# Altium PCB Mako DSP R1.1.PcbDoc
Units mil, origin at the board's own origin, x right, y up, seen from the top; angles counter-clockwise.
Board outline 4500 x 2100 mil, 4 copper layers (Top Layer, GND, Power, Bottom Layer); 169 components, 129 nets, 625 pads, 140 vias.
Unrouted connection lines stored in the file: 132.
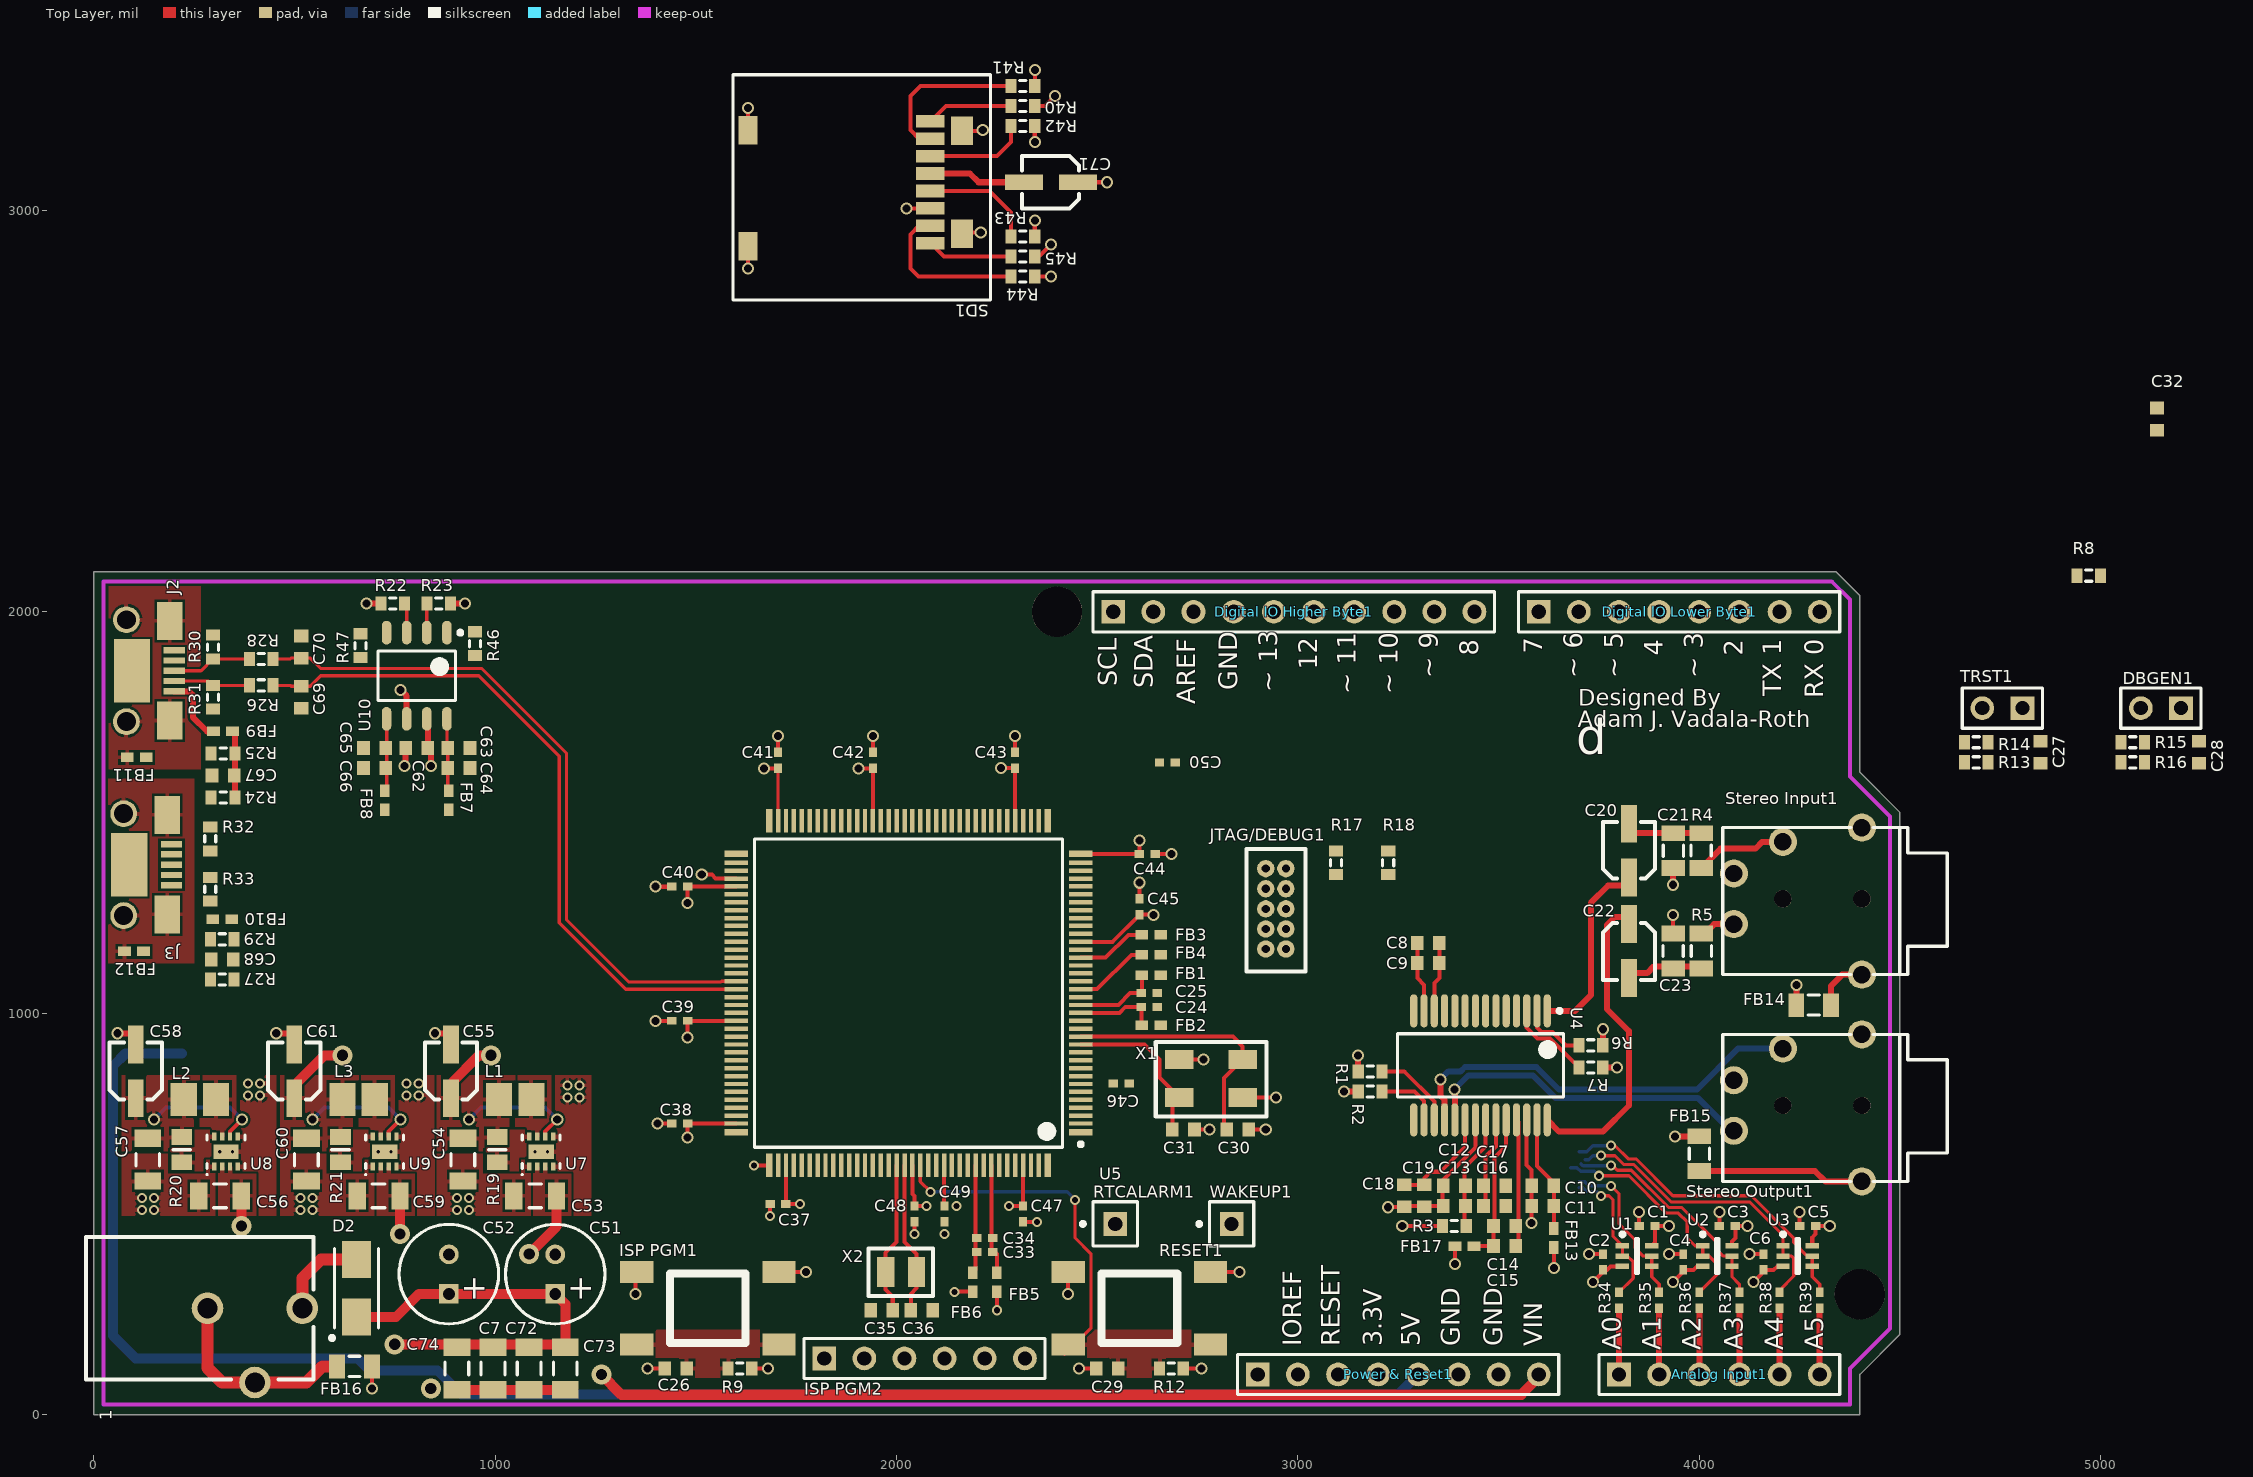
[diagram p0: Top Layer view]
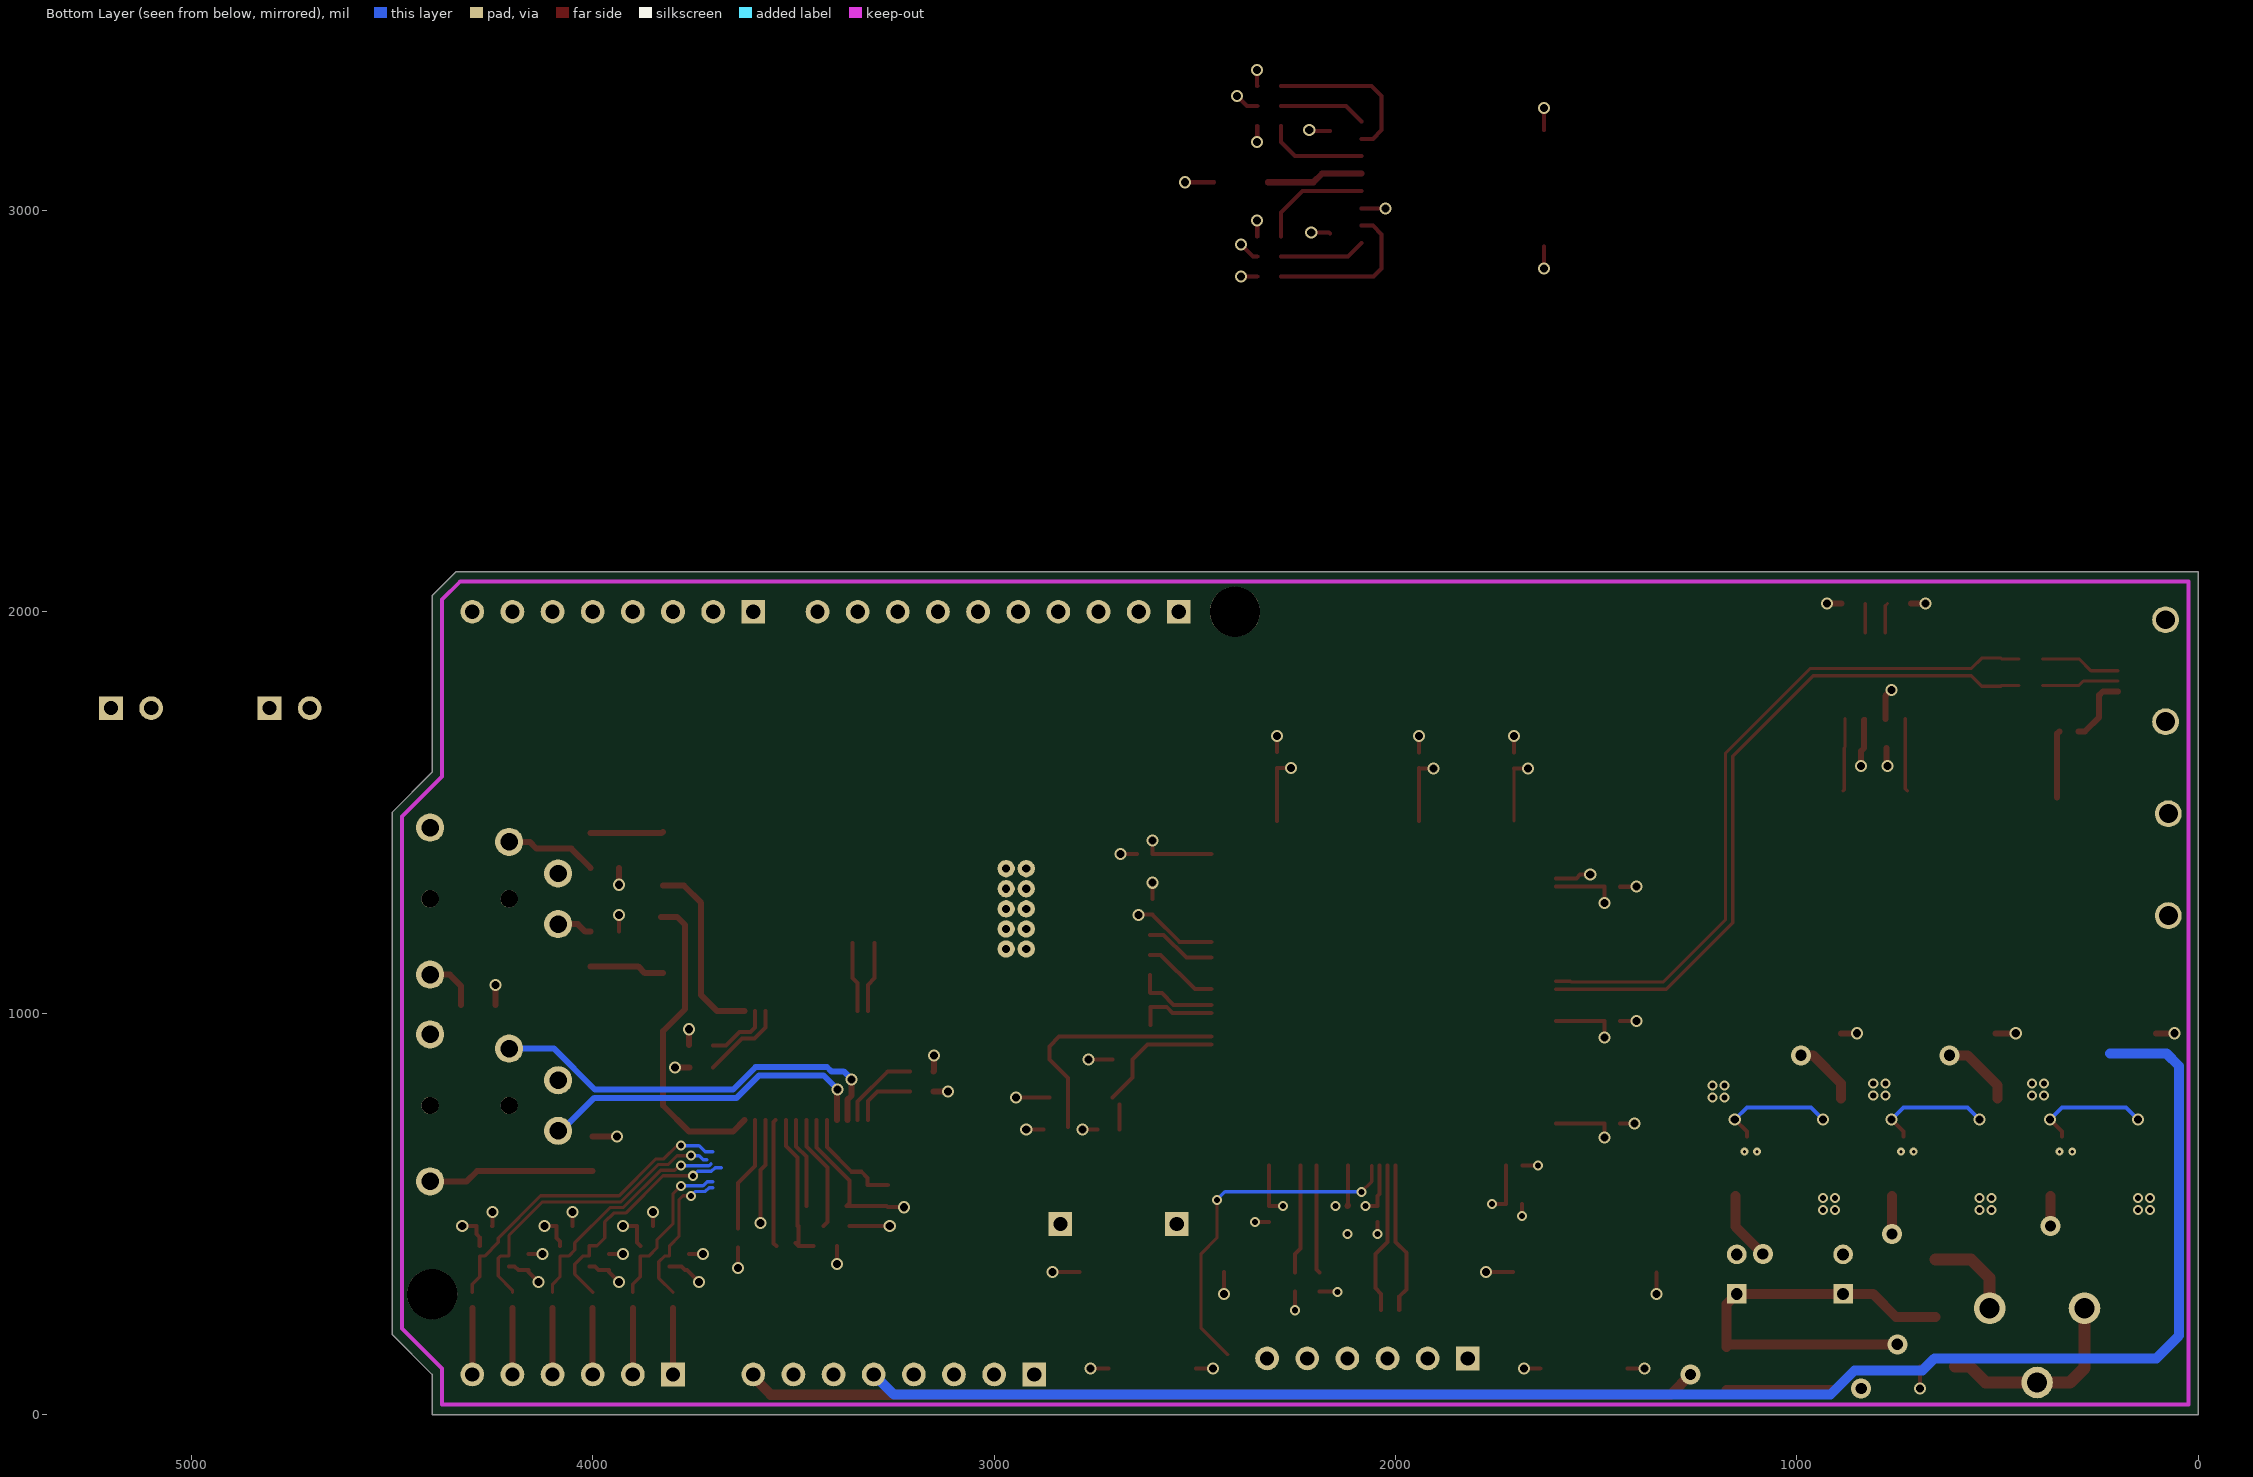
[diagram p1: Bottom Layer view, seen from below]
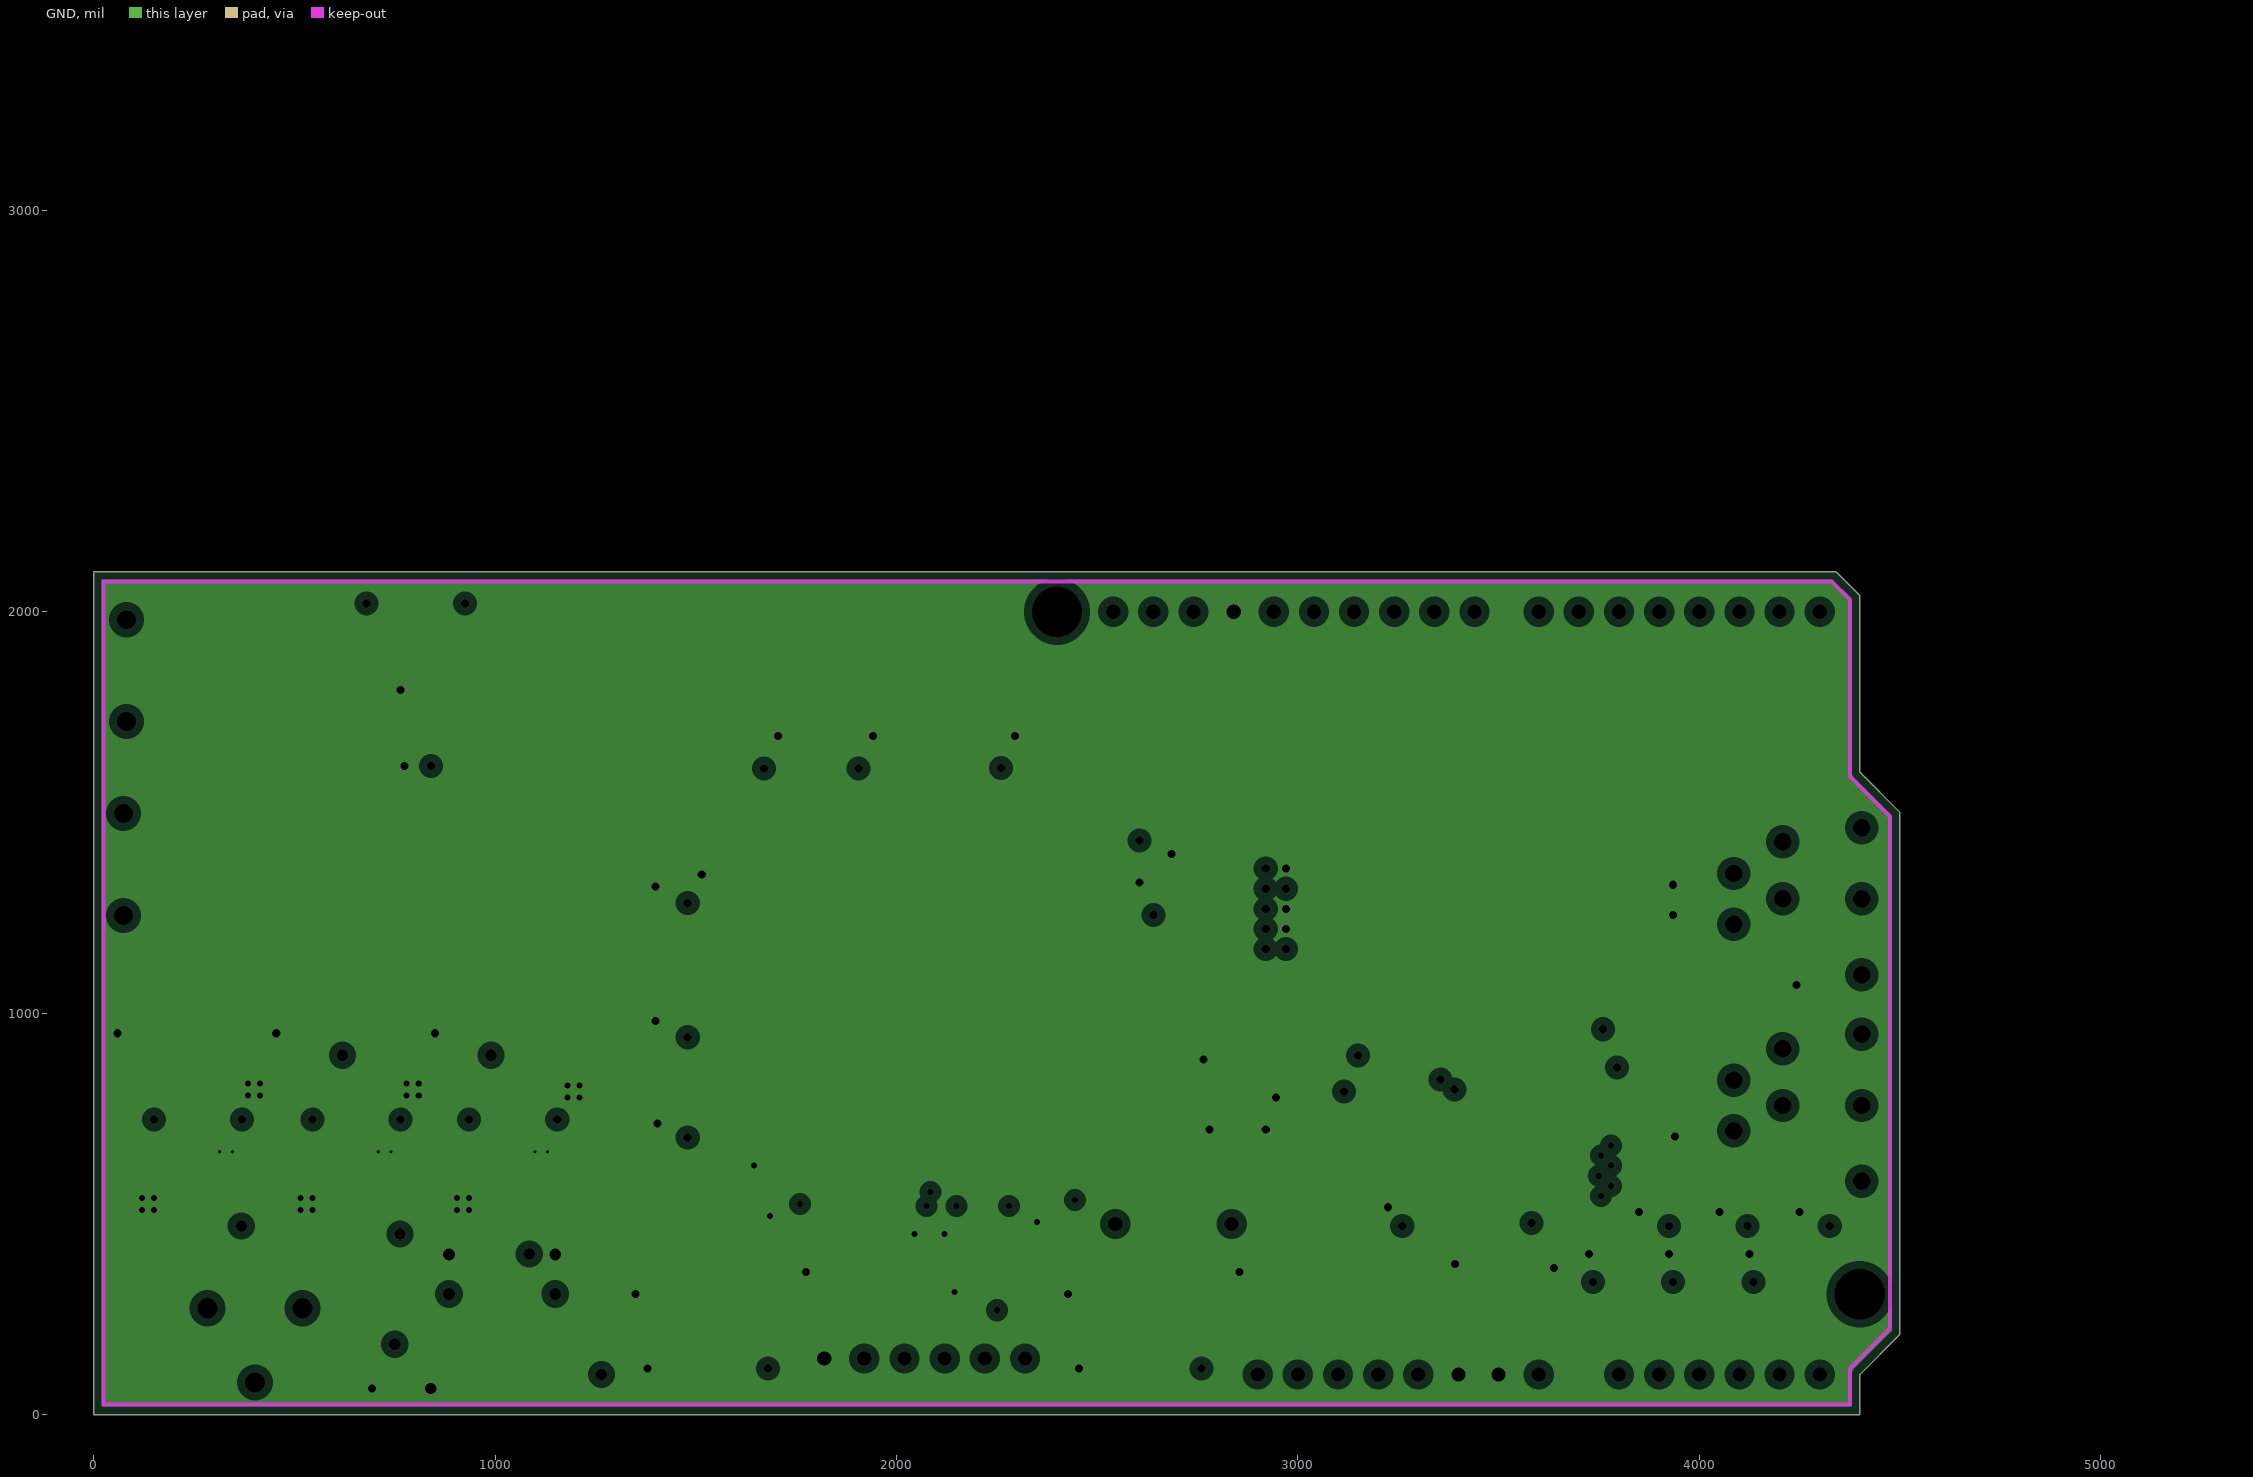
[diagram p2: GND, clearances drawn from the general rule]
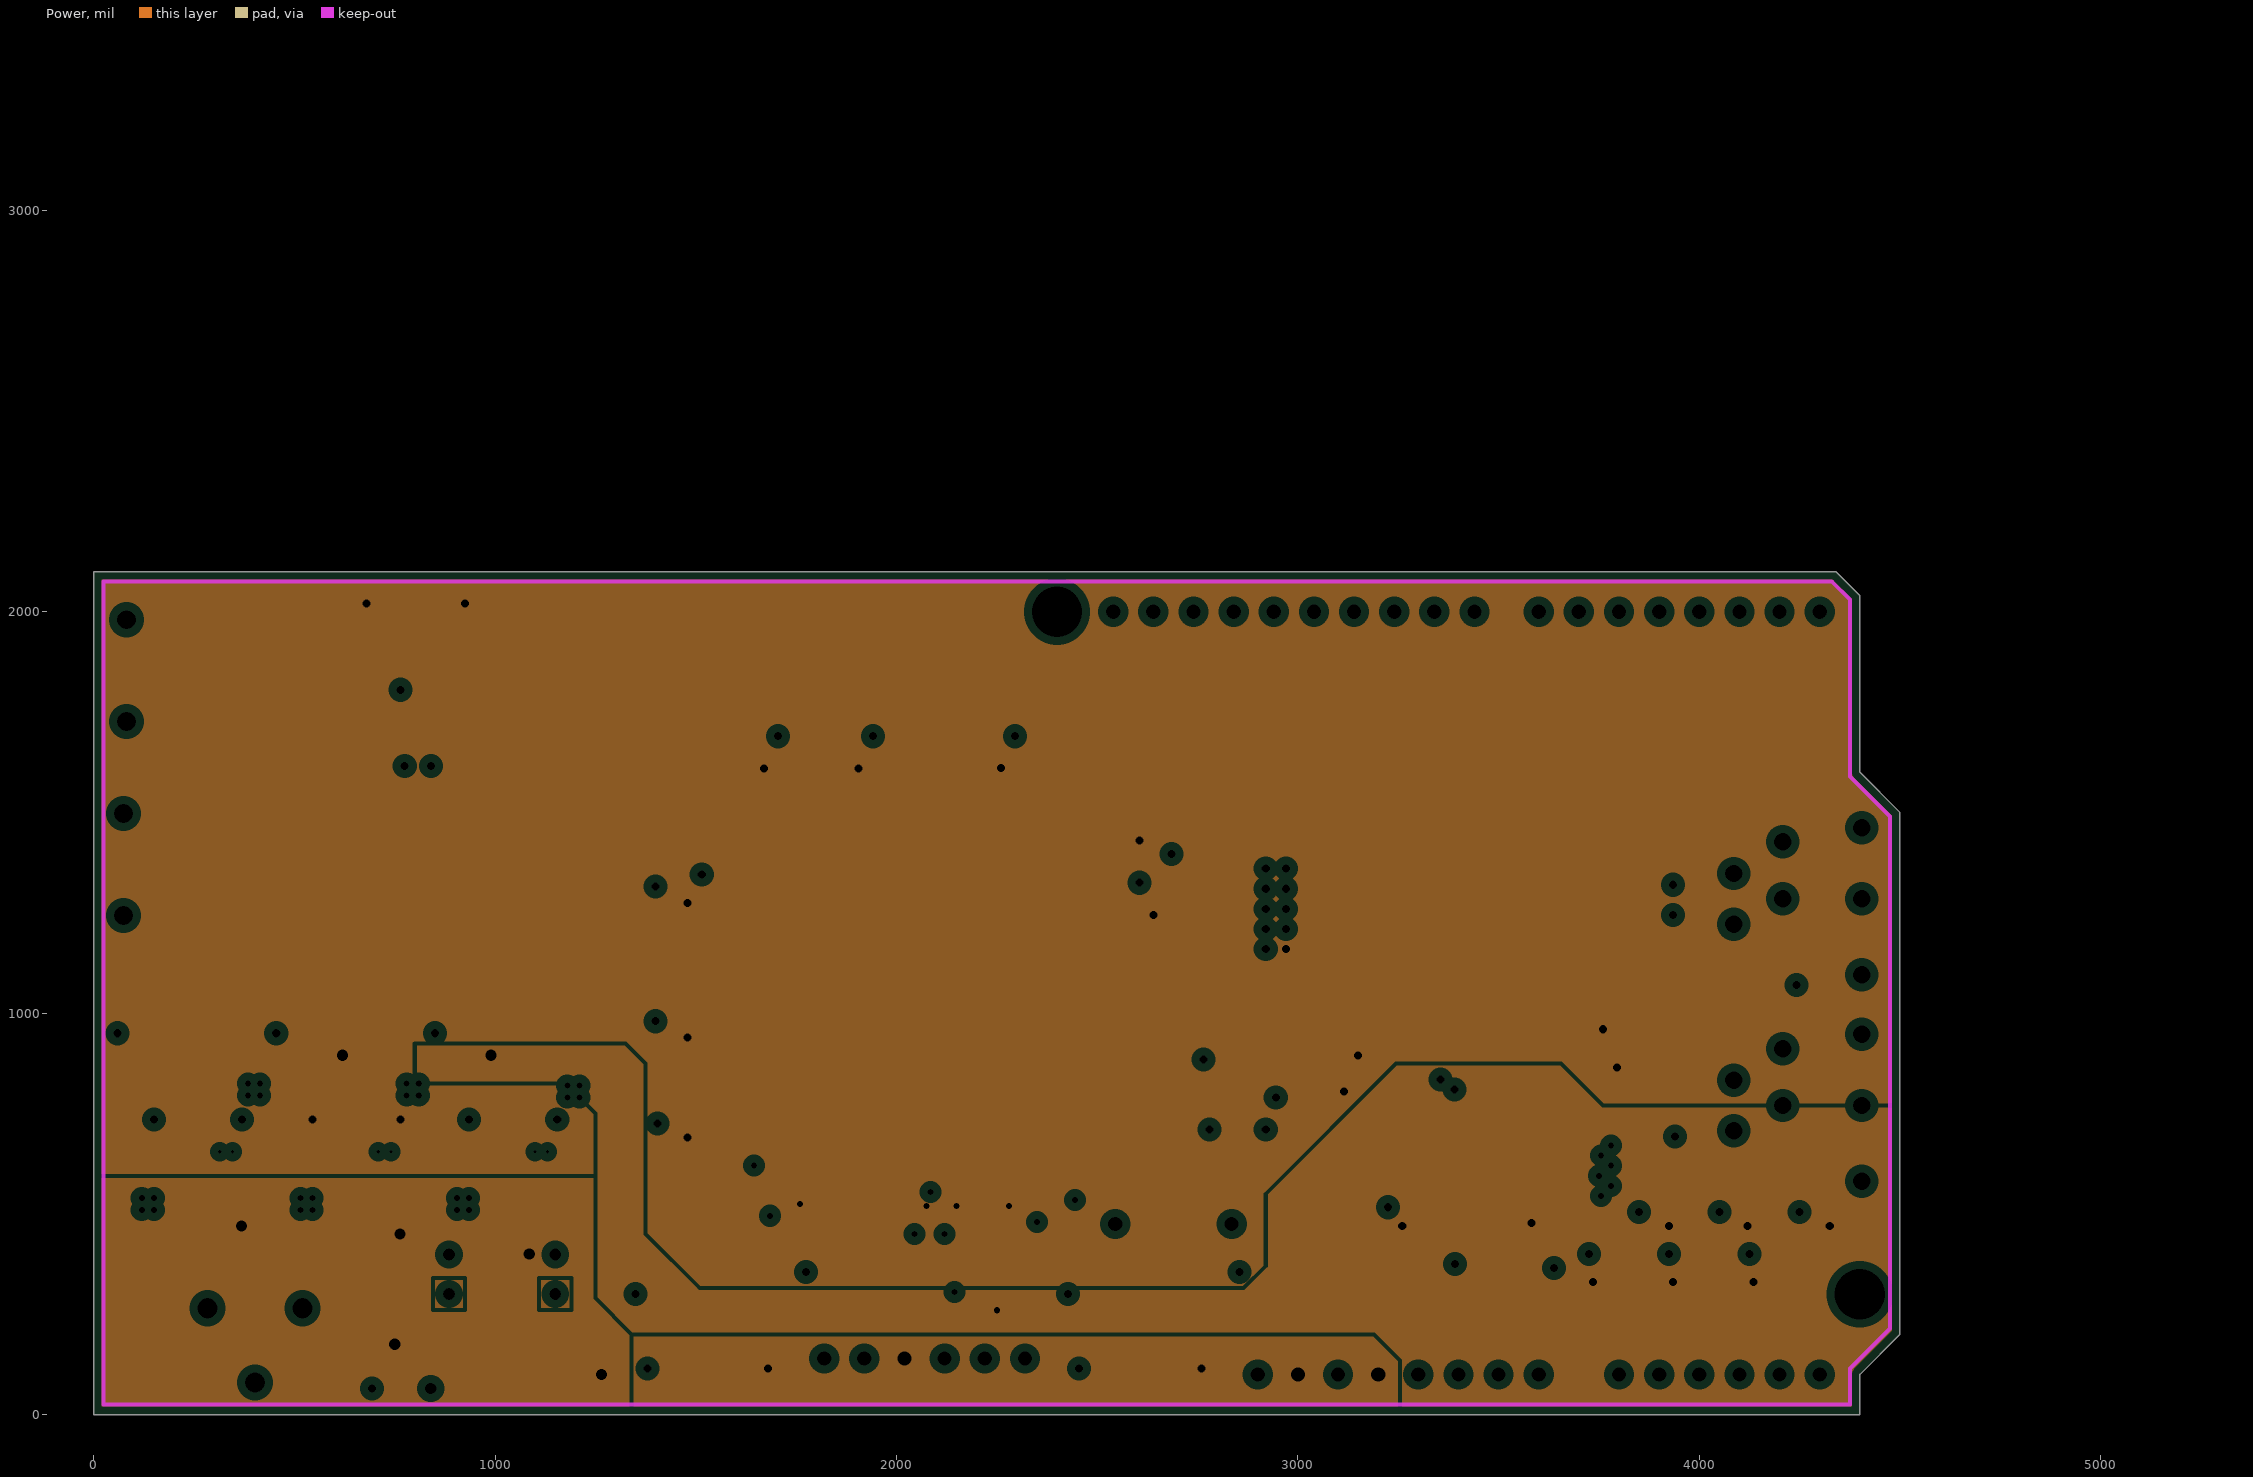
[diagram p3: Power, clearances drawn from the general rule]

## Layer stack, top to bottom
Top Layer: signal copper 1.4
Dielectric: core 12.6, FR-4, Dk 4.8
GND: plane copper 1.4, net GND
Dielectric: prepreg 12.6, FR-4, Dk 4.8
Power: plane copper 1.4, net (Multiple Nets)
Dielectric: core 12.6, FR-4, Dk 4.8
Bottom Layer: signal copper 1.4

## Board outline
0,0 0,2100 4340,2100 4400,2040 4400,1600 4500,1500 4500,200 4400,100 4400,0

## Design rules (kind name [scope] priority, off if disabled: settings)
Clearance [All] p1: gap=6
ComponentClearance [All] p1: gap=0 collisioncheckmode=3 verticalgap=10 showdistances=FALSE
DiffPairsRouting [All] p1: maxlimit=10 minlimit=10 mostfreqgap=10 maxuncoupledlength=500
FanoutControl Fanout_SOIC [(InComponent('U8') AND InComponent('U7'))] p3: bgadir=Out bgaviamode=Centered fanoutstyle=Staggered fanoutdirection=Alternating viagrid=1 // Fanout_SOIC (Default Rule)
FanoutControl Fanout_Small [All] p4: bgadir=Out bgaviamode=Centered fanoutstyle=Auto fanoutdirection=Alternating viagrid=1 // Fanout_Small (Default Rule)
HoleSize [All] p1: absolutevalues=TRUE maxlimit=120 minlimit=1 maxpercent=80.000 minpercent=20.000
MinimumSolderMaskSliver [All] p1 off: minsoldermaskwidth=10
PlaneClearance [All] p1: clearance=20
PlaneConnect [All] p1: planeconnectstyle=Direct reliefexpansion=20 reliefentries=4 reliefconductorwidth=10 reliefairgap=10
PolygonConnect [All] p1: connectstyle=Relief reliefconductorwidth=10 reliefentries=4 polygonreliefangle="90 Angle"
RoutingVias [All] p1: holewidth=15 width=25 viastyle="Through Hole" minholewidth=15 minwidth=25 maxholewidth=28 maxwidth=50
SilkToSilkClearance [All] p1 off: silktosilkclearance=10
SilkscreenOverComponentPads [All] p1 off: minsilkscreentomaskgap=10
SolderMaskExpansion [All] p1: expansion=4
Width [All] p1: maxlimit=30 minlimit=6 preferedwidth=6 minimp=50.000000 maximp=50.000000 favimp=50.000000
18 further rules are at their usual default settings.

## Classes and differential pairs
component class "Mako DSP Power R1.1": 1 12VDC/VCCIN C7 C51 C52 C53 C54 C55 C56 C57 C58 C59 C60 C61 C72 C73 C74 D2 D? FB16 L1 L2 L3 L? R19 R20 R21 U7 U8 U9
component class "Mako DSP Arduio IO R1.1": "Analog Input1" "Analog Input?" C1 C2 C3 C4 C5 C6 "Digital IO Higher Byte1" "Digital IO Higher Byte?" "Digital IO Lower Byte1" "Digital IO Lower Byte?" "Power & Reset1" "Power & Reset?" R34 R35 R36 R37 R38 R39 SSP? U1 U2 U3
component class "Mako DSP Audio Codec R1.1": C8 C9 C10 C11 C12 C13 C14 C15 C16 C17 C18 C19 C20 C21 C22 C23 FB13 FB14 FB15 FB17 R1 R2 R3 R4 R5 R6 R7 "Stereo Input1" "Stereo Input?" "Stereo Output1" "Stereo Output?" U4
component class "Mako DSP Main R1.1": C24 C25 C26 C27 C28 C29 C30 C31 C32 C33 C34 C35 C36 C37 C38 C39 C40 C41 C42 C43 C44 C45 C46 C47 C48 C49 C50 C71 DBGEN1 FB1 FB2 FB3 FB4 FB5 FB6 "ISP PGM" "ISP PGM1" "ISP PGM2" JTAG/DEBUG1 R8 R9 R12 R13 R14 R15 R16 R17 R18 R40 R41 R42 R43 R44 R45 RESET RESET1 RTCALARM1 SD1 TRST1 U5 WAKEUP1 X1 X2
component class "Mako DSP USBR1.1": C62 C63 C64 C65 C66 C67 C68 C69 C70 FB7 FB8 FB9 FB10 FB11 FB12 J2 J3 R22 R23 R24 R25 R26 R27 R28 R29 R30 R31 R32 R33 R46 R47 U10
differential pair USB_1: +USB_1_P -USB_1_N
differential pair USB1: +USB1_P -USB1_N
differential pair USB0: +USB0_P -USB0_N

## Components (designator, comment, footprint, x,y, rotation, side; value= is the part's Value field where it differs from the comment)
1 "Center-positive 2.1 mm power jack" PJ-102AH 520,265 r90 top
"Analog Input1" "Arduino Leonardo Analog" "Arduino Leonardo Analog" 3800,100 r0 top locked
C1 "Cap Semi" 0402 3870,470 r0 top
C2 "Cap Semi" 0402 3760,380 r270 top
C3 "Cap Semi" 0402 4070,470 r0 top
C4 "Cap Semi" 0402 3960,380 r270 top
C5 "Cap Semi" 0402 4270,470 r0 top
C6 "Cap Semi" 0402 4160,380 r270 top
C7 "Cap Semi" C1206 995,115 r90 top
C8 "Cap Semi" 1608[0603] 3325,1175 r180 top
C9 "Cap Semi" 1608[0603] 3325,1125 r180 top
C10 "Cap Semi" 1608[0603] 3610,570 r180 top
C11 "Cap Semi" 1608[0603] 3610,520 r180 top
C12 "Cap Semi" 1608[0603] 3390,570 r0 top
C13 "Cap Semi" 1608[0603] 3390,520 r0 top
C14 "Cap Semi" 1608[0603] 3515,470 r0 top
C15 "Cap Semi" 1608[0603] 3515,420 r0 top
C16 "Cap Semi" 1608[0603] 3490,520 r180 top
C17 "Cap Semi" 1608[0603] 3490,570 r180 top
C18 "Cap Semi" 1608[0603] 3265,545 r90 top
C19 "Cap Semi" 1608[0603] 3315,545 r90 top
C20 "Cap Semi" "Panasonic VS B" 3825,1405 r270 top
C21 "Cap Semi" "SM 0805 - gap trimmed" 3935,1405 r90 top
C22 "Cap Semi" "Panasonic VS B" 3825,1155 r90 top
C23 "Cap Semi" "SM 0805 - gap trimmed" 3935,1155 r270 top
C24 "Cap Semi" 0402 2630,1015 r180 top
C25 "Cap Semi" 0402 2630,1050 r180 top
C26 "Cap Semi" CAPC1608L 1450,115 r0 top
C27 "Cap Semi" CAPC1608L 4850,1650 r90 top
C28 "Cap Semi" CAPC1608L 5245,1650 r90 top
C29 "Cap Semi" CAPC1608L 2525,115 r0 top
C30 "Cap Semi" 1608[0603] 2850,710 r0 top
C31 "Cap Semi" 1608[0603] 2715,710 r180 top
C32 "Cap Semi" CAPC1608L 5140,2480 r90 top
C33 "Cap Semi" 0402 2220,405 r0 top
C34 "Cap Semi" 0402 2220,440 r0 top
C35 "Cap Semi" 1608[0603] 1963.23,260 r0 top
C36 "Cap Semi" 1608[0603] 2063.23,260 r180 top
C37 "Cap Semi" 0402 1705,525 r0 top
C38 "Cap Semi" 0402 1460,725 r0 top
C39 "Cap Semi" 0402 1460,981.1 r0 top
C40 "Cap Semi" 0402 1460,1315.75 r0 top
C41 "Cap Semi" 0402 1705.2,1630 r270 top
C42 "Cap Semi" 0402 1941.42,1630 r270 top
C43 "Cap Semi" 0402 2295.75,1630 r270 top
C44 "Cap Semi" 0402 2625,1396.85 r180 top
C45 "Cap Semi" 0402 2605,1265 r270 top
C46 "Cap Semi" 0402 2560,825 r180 top
C47 "Cap Semi" 0402 2315,500 r90 top
C48 "Cap Semi" 0402 2045,500 r90 top
C49 "Cap Semi" 0402 2120,500 r90 top
C50 "Cap Semi" 0402 2675,1625 r0 top
C51 "Cap Pol1" CAPPR2.5-6.3x5 1150,350 r90 top
C52 "Cap Pol1" CAPPR2.5-6.3x5 885,350 r90 top
C53 "Cap Semi" C1206 1100,545 r0 top
C54 "Cap Semi" C1206 920,635 r90 top
C55 "Cap Semi" "Panasonic VS B" 890,855 r270 top
C56 "Cap Semi" C1206 315,545 r0 top
C57 "Cap Semi" C1206 135,635 r90 top
C58 "Cap Semi" "Panasonic VS B" 105,855 r270 top
C59 "Cap Semi" C1206 710,545 r0 top
C60 "Cap Semi" C1206 530,635 r90 top
C61 "Cap Semi" "Panasonic VS B" 500,855 r270 top
C62 "Cap Semi" 1608[0603] 805,1660.65 r0 top
C63 "Cap Semi" 1608[0603] 910,1660.65 r180 top
C64 "Cap Semi" 1608[0603] 910,1610.65 r180 top
C65 "Cap Semi" 1608[0603] 700,1660.65 r0 top
C66 "Cap Semi" 1608[0603] 700,1610.65 r0 top
C67 "Cap Semi" 1608[0603] 322.36,1592.15 r0 top
C68 "Cap Semi" 1608[0603] 320.57,1134.02 r0 top
C69 "Cap Semi" 1608[0603] 517.36,1787.15 r90 top
C70 "Cap Semi" 1608[0603] 517.36,1912.15 r270 top
C71 "Cap Semi" "Panasonic VS B" 2385,3070 r0 top
C72 "Cap Semi" C1206 1085,115 r90 top
C73 "Cap Semi" C1206 1175,115 r90 top
C74 "Cap Semi" C1206 905,115 r90 top
D2 "PMEG4050EP" PMEG4050EP 655,315 r90 top
DBGEN1 "Header 2" HDR1X2 5200,1760 r180 top
"Digital IO Higher Byte1" "Arduino Leonardo High Byte" "Arduino Leonardo High Byte" 2540,2000 r0 top locked
"Digital IO Lower Byte1" "Arduino Leonardo Low Byte" "Arduino Leonardo Low Byte" 3600,2000 r0 top locked
FB1 "BLM15HG601SN1D" BLM18PG121SN1D 2635,1095 r180 top
FB2 "BLM15HG601SN1D" BLM18PG121SN1D 2635,970 r180 top
FB3 "BLM15HG601SN1D" BLM18PG121SN1D 2635,1195 r0 top
FB4 "BLM15HG601SN1D" BLM18PG121SN1D 2635,1145 r0 top
FB5 "BLM15HG601SN1D" BLM18PG121SN1D 2250,330 r90 top
FB6 "BLM15HG601SN1D" BLM18PG121SN1D 2190,330 r90 top
FB7 "BLM15HG601SN1D" BLM18PG121SN1D 885,1530.65 r270 top
FB8 "BLM15HG601SN1D" BLM18PG121SN1D 725,1530.65 r270 top
FB9 "BLM15HG601SN1D" BLM18PG121SN1D 322.36,1702.15 r180 top
FB10 "BLM15HG601SN1D" BLM18PG121SN1D 320.57,1234.02 r180 top
FB11 "BLM15HG601SN1D" BLM18PG121SN1D 107.36,1637.15 r0 top
FB12 "BLM15HG601SN1D" BLM18PG121SN1D 100.57,1154.02 r0 top
FB13 "BLM15HG601SN1D" BLM18PG121SN1D 3637.56,440 r270 top
FB14 "Ferrite" "SM 0805 - gap trimmed" 4285,1020 r180 top
FB15 "Ferrite" "SM 0805 - gap trimmed" 4000,650 r90 top
FB16 "Ferrite" "SM 0805 - gap trimmed" 650,120 r180 top
FB17 "BLM15HG601SN1D" BLM18PG121SN1D 3415,420 r180 top
"ISP PGM1" "Tactile Switch" TL3301 1530,265 r90 top
"ISP PGM2" "Header 6" HDR1X6 1820,140 r0 top
J2 "DX4R005J91R5100" "Micro USB Circular Holes Only" 42.36,1852.15 r270 top
J3 "DX4R005J91R5100" "Micro USB Circular Holes Only" 35.57,1369.02 r270 top
JTAG/DEBUG1 "S9015E-05-ND" S9015E-05-ND 2970,1360 r270 top
L1 "Inductor" VLS252012T-2R2M1R3 1050,785 r180 top
L2 "Inductor" VLS252012T-2R2M1R3 265,785 r180 top
L3 "Inductor" VLS252012T-2R2M1R3 660,785 r180 top
"Power & Reset1" "Arduino Leonardo Power" "Arduino Leonardo Power" 2900,100 r0 top locked
R1 "Res3" J1-0603 3180,855 r180 top
R2 "Res3" J1-0603 3180,805 r180 top
R3 "Res3" J1-0603 3390,470 r180 top
R4 "Res3" "SM 0805 - gap trimmed" 4005,1405 r270 top
R5 "Res3" "SM 0805 - gap trimmed" 4005,1155 r90 top
R6 "Res3" J1-0603 3730,920 r180 top
R7 "Res3" J1-0603 3730,865 r180 top
R8 "Res3" J1-0603 4970,2090 r0 top
R9 "Res3" J1-0603 1610,115 r0 top
R12 "Res3" J1-0603 2685,115 r0 top
R13 "Res3" J1-0603 4690,1625 r0 top
R14 "Res3" J1-0603 4690,1675 r0 top
R15 "Res3" J1-0603 5080,1675 r0 top
R16 "Res3" J1-0603 5080,1625 r0 top
R17 "Res3" J1-0603 3095,1375 r90 top
R18 "Res3" J1-0603 3225,1375 r90 top
R19 "Res3" RESC2012L 1005,660 r90 top
R20 "Res3" RESC2012L 220,660 r90 top
R21 "Res3" RESC2012L 615,660 r90 top
R22 "Res3" J1-0603 745,2020.65 r0 top
R23 "Res3" J1-0603 860,2020.65 r180 top
R24 "Res3" J1-0603 322.36,1537.15 r180 top
R25 "Res3" J1-0603 322.36,1647.15 r180 top
R26 "Res3" J1-0603 417.36,1816.68 r180 top
R27 "Res3" J1-0603 320.57,1084.02 r180 top
R28 "Res3" J1-0603 417.36,1882.63 r180 top
R29 "Res3" J1-0603 320.57,1184.02 r180 top
R30 "Res3" J1-0603 297.36,1912.15 r90 top
R31 "Res3" J1-0603 297.36,1787.15 r270 top
R32 "Res3" J1-0603 290.57,1434.02 r90 top
R33 "Res3" J1-0603 290.57,1309.02 r270 top
R34 "Res3" "0402 - duplicate" 3800,285 r90 top
R35 "Res3" "0402 - duplicate" 3900,285 r90 top
R36 "Res3" "0402 - duplicate" 4000,285 r90 top
R37 "Res3" "0402 - duplicate" 4100,285 r90 top
R38 "Res3" "0402 - duplicate" 4200,285 r90 top
R39 "Res3" "0402 - duplicate" 4300,285 r90 top
R40 "Res3" J1-0603 2315,3260 r180 top
R41 "Res3" J1-0603 2315,3310 r180 top
R42 "Res3" J1-0603 2315,3210 r180 top
R43 "Res3" J1-0603 2315,2935 r180 top
R44 "Res3" J1-0603 2315,2835 r180 top
R45 "Res3" J1-0603 2315,2885 r180 top
R46 "Res3" J1-0603 950,1920.65 r270 top
R47 "Res3" J1-0603 665,1915.65 r90 top
RESET1 "Tactile Switch" TL3301 2605,265 r90 top
RTCALARM1 "Socket" PIN1 2545,475 r90 top
SD1 "JAE SJ107021" "JAE SJ107021" 1630,3070 r180 top
"Stereo Input1" "CUI 43515TS" "CUI SJ-43515TS" 4405,1285 r180 top
"Stereo Output1" "CUI 43515TS" "CUI SJ-43515TS" 4405,770 r180 top
TRST1 "Header 2" HDR1X2 4805,1760 r180 top
U1 "BAV70S SOT-363" BAV70S_SOT363 3845,395 r0 top
U2 "BAV70S SOT-363" BAV70S_SOT363 4045,395 r0 top
U3 "BAV70S SOT-363" BAV70S_SOT363 4245,395 r0 top
U4 "WM8778" WM8778 3455,870 r270 top
U5 "LPC4330FBD144" SOT486-1_V 2030,1050 r180 top
U7 "TPS62162SOP" DSG8-1600X900TP 1115,655 r90 top
U8 "TPS62162SOP" DSG8-1600X900TP 330,655 r90 top
U9 "TPS62162SOP" DSG8-1600X900TP 725,655 r90 top
U10 "LM3526-H" LM3526 805,1840.65 r270 top
WAKEUP1 "Socket" PIN1 2835,475 r90 top
X1 "ABM3B-12.000MHZ-B2-T" ABM3B-12.000MHZ-B2-T 2705,790 r0 top
X2 "ABS07-32.768KHZ-T" ABS07-32.768KHZ-T 1973.23,355 r0 top

## Footprints (in the part's own frame and the unit in brackets; to place one, negate y for a bottom-side part, rotate by r counter-clockwise, add the part's x,y. Pads: shape width x height; smd on the part's side, far side on the other; paste and mask are expansions set on the pad)
0402 [mm] "Chip Capacitor, Body 1.0x0.5mm, IPC High Density"
  rect 0.6x0.5 smd: 1(-0.5,0) 2(0.5,0)
  body extent -0.55,-0.3 0.55,0.3, height 1.3
"0402 - duplicate" [mm] "Chip Capacitor, Body 1.0x0.5mm, IPC High Density"
  rect 0.6x0.5 smd: 1(-0.5,0) 2(0.5,0)
  body extent -0.55,-0.3 0.55,0.3, height 1.3
1608[0603] [mm] "Chip Capacitor, Body 1.6x0.8mm, IPC High Density"
  rect 0.8x0.9 smd: 1(-0.7,0) 2(0.7,0)
  body extent -0.87,-0.48 0.87,0.48, height 1.3
ABM3B-12.000MHZ-B2-T [mm] "ABM3B-12.000MHZ-B2-T 12MHZ Crystam Oscillator"
  rect 1.8x1.2 smd: 1(0,0) 2(4,0) 3(4,2.4) 4(0,2.4)
  silkscreen extent -1.5,-1.2 5.5,3.5
ABS07-32.768KHZ-T [mm] "ABS07-32.768KHZ-T Crystal Oscillator"
  rect 1.1x1.9 smd: 1(0,0) 2(1.95,0)
  silkscreen extent -1.1,-1.5 3,1.5
"Arduino Leonardo Analog" [mm] "Connector; Header; 6 Position"
  rect 1.5x1.5 hole 0.9: 1(0,0)
  round 1.5 hole 0.9: 2(2.54,0) 3(5.08,0) 4(7.62,0) 5(10.16,0) 6(12.7,0)
  silkscreen extent -1.27,-1.27 13.97,1.27
"Arduino Leonardo High Byte" [mm]
  rect 1.5x1.5 hole 0.9: 1(0,0)
  round 1.5 hole 0.9: 2(2.54,0) 3(5.08,0) 4(7.62,0) 5(10.16,0) 6(12.7,0) 7(15.24,0) 8(17.78,0) 9(20.32,0) 10(22.86,0)
  silkscreen extent -1.27,-1.27 24.13,1.27
"Arduino Leonardo Low Byte" [mm] "Connector; Header; 8 Position"
  rect 1.5x1.5 hole 0.9: 1(0,0)
  round 1.5 hole 0.9: 2(2.54,0) 3(5.08,0) 4(7.62,0) 5(10.16,0) 6(12.7,0) 7(15.24,0) 8(17.78,0)
  silkscreen extent -1.27,-1.27 19.05,1.27
"Arduino Leonardo Power" [mm] "Connector; Header; 8 Position"
  rect 1.5x1.5 hole 0.9: 1(0,0)
  round 1.5 hole 0.9: 2(2.54,0) 3(5.08,0) 4(7.62,0) 5(10.16,0) 6(12.7,0) 7(15.24,0) 8(17.78,0)
  silkscreen extent -1.27,-1.27 19.05,1.27
BAV70S_SOT363 [mm] "SOT23, 6-Leads, Body 2.2x2.2mm (max), Pitch 0.65mm, IPC Medium Density"
  rect 0.85x0.35 smd: 1(-0.925,0.65) 2(-0.925,0) 3(-0.925,-0.65) 4(0.925,-0.65) 5(0.925,0) 6(0.925,0.65)
  silkscreen extent -1.05,-1.1 0.1,1.5, body extent -0.67,-1.1 0.67,1.1, height 1.1
BLM18PG121SN1D [mm] "Chip Inductor, 2-Leads, Body 1.0x0.5mm, IPC Medium Density"
  rect 0.8x0.6 smd: 1(-0.6,0) 2(0.6,0)
  body extent -0.52,-0.28 0.53,0.27, height 0.6
C1206 [mm] "Chip Capacitor, Body 3.2x1.6mm, IPC High Density"
  rect 1.1x1.7 smd: 1(-1.35,0) 2(1.35,0)
  silkscreen extent -0.4,-0.75 0.4,0.75, body extent -1.7,-0.9 1.7,0.9, height 1.3
CAPC1608L [mm] "Chip Capacitor, Body 1.6x0.8mm, IPC High Density"
  rect 0.8x0.9 smd: 1(-0.7,0) 2(0.7,0)
  body extent -0.87,-0.48 0.87,0.48, height 0.85
CAPPR2.5-6.3x5 [mm] "Capacitor, Electrolytic, Radial; Body 6.3 x 5 mm (Dia.xH typ); Pin Spacing 2.5 mm (typ)"
  rect 1.25x1.25 hole 0.75: 1(-1.25,0)
  round 1.25 hole 0.75: 2(1.25,0)
  silkscreen extent -3.15,-3.15 3.15,3.15
"CUI SJ-43515TS" [mm]
  round 1.778 hole 1.1: 1(8.1,1.6) 3(8.1,-1.6) 4(5,-3.6) 5(0,4.8) 6(0,-4.5)
  round 1.1 hole 1.1: ""(0,0) ""(5,0)
  silkscreen extent -5.4,-4.5 8.8,4.8
DSG8-1600X900TP [mm] "SON, 8-Leads, Body 2x2mm, Pitch 0.5mm, Thermal Pad 1.6x0.9mm, TI Recommended"
  rect 0.5x0.28 smd paste-0.14 mask+0.07: 1(-0.95,0.75) 2(-0.95,0.25) 3(-0.95,-0.25) 4(-0.95,-0.75) 5(0.95,-0.75) 6(0.95,-0.25) 7(0.95,0.25) 8(0.95,0.75)
  rect 0.9x1.6 smd paste-0.45 mask+0.07: 9(0,0)
  silkscreen extent -1.5,-1.2 1.05,1.25, body extent -1.05,-1.05 1.05,1.05, height 0.8
HDR1X2 [mm] "Connector; Header; 2 Position"
  rect 1.5x1.5 hole 0.9: 1(0,0)
  round 1.5 hole 0.9: 2(2.54,0)
  silkscreen extent -1.27,-1.27 3.81,1.27
HDR1X6 [mm] "Connector; Header; 6 Position"
  rect 1.5x1.5 hole 0.9: 1(0,0)
  round 1.5 hole 0.9: 2(2.54,0) 3(5.08,0) 4(7.62,0) 5(10.16,0) 6(12.7,0)
  silkscreen extent -1.27,-1.27 13.97,1.27
J1-0603 [mm] "Chip Resistor, Body 1.6x0.8mm, IPC High Density"
  rect 0.7x0.9 smd: 1(-0.75,0) 2(0.75,0)
  silkscreen extent -0.2,-0.35 0.2,0.35, body extent -0.85,-0.48 0.85,0.48, height 0.9
"JAE SJ107021" [mm] "MicroSD card socket"
  rect 1.8x0.8 smd: 1(-11.55,-3.85) 2(-11.55,-2.75) 3(-11.55,-1.65) 4(-11.55,-0.55) 5(-11.55,0.55) 6(-11.55,1.65) 7(-11.55,2.75) 8(-11.55,3.85)
  rect 1.2x1.8 smd: 9(0,-3.3) 10(0,4.05)
  rect 1.4x1.8 smd: 11(-13.55,-3.25) 12(-13.55,3.25)
  silkscreen extent -15.35,-6.8 0.95,7.45, body extent -15.25,-6.75 1,7.5, height 2
LM3526 [mm] "TSOP, 8-Leads, Body 4.9x3.9mm (max), Pitch 1.27mm, IPC Medium Density"
  oval 1.5x0.6 smd: 1(-2.725,1.905) 2(-2.725,0.635) 3(-2.725,-0.635) 4(-2.725,-1.905) 5(2.725,-1.905) 6(2.725,-0.635) 7(2.725,0.635) 8(2.725,1.905)
  silkscreen extent -2.85,-2.45 1.57,2.88, body extent -1.95,-2.45 1.95,2.45, height 1.45
"Micro USB Circular Holes Only" [mm]
  rect 0.4x1.35 smd: 1(1.275,4.025) 2(0.625,4.025) 3(-0.025,4.025) 4(-0.675,4.025) 5(-1.325,4.025)
  rect 2.4x1.6 smd: 6(3.125,3.75) 9(-3.175,3.75)
  round 1.7 hole 1.2: 7(3.2,1) 8(-3.25,1)
  rect 4x2.3 smd: GND(-0.025,1.35)
"Panasonic VS B" [mm]
  rect 2.4x1 smd: 1(1.7,0) 2(-1.7,0)
  silkscreen extent -1.83,-1.65 1.78,1.65
PIN1 [mm] "Connector; Plug"
  rect 1.5x1.5 hole 0.9: 1(0,0)
  silkscreen extent -1.4,-1.4 1.4,2.17
PJ-102AH [mm] "Center positive 2.1 mm power jack"
  round 2 hole 1.27: 1(0,0) 2(0,6) 3(-4.7,3)
  silkscreen extent -4.5,-0.7 4.5,13.7, body extent -5.8,-0.7 4.5,13.7, height 11
PMEG4050EP [mm] "PMEG4050EP NXP SMD Schottky Diode"
  rect 2.35x1.85 smd: 1(-1.825,0) 2(1.825,0)
  silkscreen extent -3.27,-1.4 2.5,1.67, body extent -2.5,-1.35 2.5,1.35, height 1.1
RESC2012L [mm] "Chip Resistor, Body 2.0x1.3mm, IPC High Density"
  rect 1x1.3 smd: 1(-0.8,0) 2(0.8,0)
  silkscreen extent 0,-0.55 0,0.55, body extent -1.07,-0.7 1.07,0.7, height 0.65
S9015E-05-ND [mm] "10 Pin Cortex JTAG Debug Header"
  round 1.1 hole 0.508: 1(5.08,0) 2(5.08,-1.27) 3(3.81,0) 4(3.81,-1.27) 5(2.54,0) 6(2.54,-1.27) 7(1.27,0) 8(1.27,-1.27) 9(0,0) 10(0,-1.27)
  round 0.5 on Top Overlay: 1(7,0.8)
  silkscreen extent -1.25,-2.5 6.5,1.25
"SM 0805 - gap trimmed" [mm]
  rect 1x1.5 smd: 1(-1.1,0) 2(1.1,0)
  silkscreen extent -0.36,-0.64 0.35,0.63
SOT486-1_V [mm] "Thin QFP, 144-Leads, Body 20x20mm, Pitch 0.5mm, NXP Recommended"
  rect 1.5x0.4 smd: 1(-10.9,8.81) 36(-10.9,-8.81) 73(10.9,-8.81) 108(10.9,8.81)
  rect 1.5x0.28 smd: 2(-10.9,8.25) 3(-10.9,7.75) 4(-10.9,7.25) 5(-10.9,6.75) 6(-10.9,6.25) 7(-10.9,5.75) 8(-10.9,5.25) 9(-10.9,4.75) 10(-10.9,4.25) 11(-10.9,3.75) 12(-10.9,3.25) 13(-10.9,2.75) 14(-10.9,2.25) 15(-10.9,1.75) 16(-10.9,1.25) 17(-10.9,0.75) 18(-10.9,0.25) 19(-10.9,-0.25) 20(-10.9,-0.75) 21(-10.9,-1.25) 22(-10.9,-1.75) 23(-10.9,-2.25) 24(-10.9,-2.75) 25(-10.9,-3.25) 26(-10.9,-3.75) 27(-10.9,-4.25) 28(-10.9,-4.75) 29(-10.9,-5.25) 30(-10.9,-5.75) 31(-10.9,-6.25) 32(-10.9,-6.75) 33(-10.9,-7.25) 34(-10.9,-7.75) 35(-10.9,-8.25) 74(10.9,-8.25) 75(10.9,-7.75) 76(10.9,-7.25) 77(10.9,-6.75) 78(10.9,-6.25) 79(10.9,-5.75) 80(10.9,-5.25) 81(10.9,-4.75) 82(10.9,-4.25) 83(10.9,-3.75) 84(10.9,-3.25) 85(10.9,-2.75) 86(10.9,-2.25) 87(10.9,-1.75) 88(10.9,-1.25) 89(10.9,-0.75) 90(10.9,-0.25) 91(10.9,0.25) 92(10.9,0.75) 93(10.9,1.25) 94(10.9,1.75) 95(10.9,2.25) 96(10.9,2.75) 97(10.9,3.25) 98(10.9,3.75) 99(10.9,4.25) 100(10.9,4.75) 101(10.9,5.25) 102(10.9,5.75) 103(10.9,6.25) 104(10.9,6.75) 105(10.9,7.25) 106(10.9,7.75) 107(10.9,8.25)
  rect 0.4x1.5 smd: 37(-8.81,-10.9) 72(8.81,-10.9) 109(8.81,10.9) 144(-8.81,10.9)
  rect 0.28x1.5 smd: 38(-8.25,-10.9) 39(-7.75,-10.9) 40(-7.25,-10.9) 41(-6.75,-10.9) 42(-6.25,-10.9) 43(-5.75,-10.9) 44(-5.25,-10.9) 45(-4.75,-10.9) 46(-4.25,-10.9) 47(-3.75,-10.9) 48(-3.25,-10.9) 49(-2.75,-10.9) 50(-2.25,-10.9) 51(-1.75,-10.9) 52(-1.25,-10.9) 53(-0.75,-10.9) 54(-0.25,-10.9) 55(0.25,-10.9) 56(0.75,-10.9) 57(1.25,-10.9) 58(1.75,-10.9) 59(2.25,-10.9) 60(2.75,-10.9) 61(3.25,-10.9) 62(3.75,-10.9) 63(4.25,-10.9) 64(4.75,-10.9) 65(5.25,-10.9) 66(5.75,-10.9) 67(6.25,-10.9) 68(6.75,-10.9) 69(7.25,-10.9) 70(7.75,-10.9) 71(8.25,-10.9) 110(8.25,10.9) 111(7.75,10.9) 112(7.25,10.9) 113(6.75,10.9) 114(6.25,10.9) 115(5.75,10.9) 116(5.25,10.9) 117(4.75,10.9) 118(4.25,10.9) 119(3.75,10.9) 120(3.25,10.9) 121(2.75,10.9) 122(2.25,10.9) 123(1.75,10.9) 124(1.25,10.9) 125(0.75,10.9) 126(0.25,10.9) 127(-0.25,10.9) 128(-0.75,10.9) 129(-1.25,10.9) 130(-1.75,10.9) 131(-2.25,10.9) 132(-2.75,10.9) 133(-3.25,10.9) 134(-3.75,10.9) 135(-4.25,10.9) 136(-4.75,10.9) 137(-5.25,10.9) 138(-5.75,10.9) 139(-6.25,10.9) 140(-6.75,10.9) 141(-7.25,10.9) 142(-7.75,10.9) 143(-8.25,10.9)
  silkscreen extent -11.02,-9.75 9.75,9.75, body extent -10,-10 10,10, height 1.6
TL3301 [mm]
  rect 1.4x2.1 smd: 1(-2.3,4.5) 1(-2.3,-4.5) 2(2.3,4.5) 2(2.3,-4.5)
  silkscreen extent -2.2,-2.4 2.2,2.4
VLS252012T-2R2M1R3 [mm] "Precision Wire Wound Inductor, 2-Leads, Body 2.5x2.0mm, IPC Medium Density"
  rect 1.65x2.1 smd: 1(-1.025,0) 2(1.025,0)
  body extent -1.3,-1.05 1.3,1.05, height 1.2
WM8778 [mm] "SOP, 28 Pin Wolfson Audio WM8778 Audio Codec"
  oval 2.1x0.45 smd: 1(-3.45,4.225) 2(-3.45,3.575) 3(-3.45,2.925) 4(-3.45,2.275) 5(-3.45,1.625) 6(-3.45,0.975) 7(-3.45,0.325) 8(-3.45,-0.325) 9(-3.45,-0.975) 10(-3.45,-1.625) 11(-3.45,-2.275) 12(-3.45,-2.925) 13(-3.45,-3.575) 14(-3.45,-4.225) 15(3.45,-4.225) 16(3.45,-3.575) 17(3.45,-2.925) 18(3.45,-2.275) 19(3.45,-1.625) 20(3.45,-0.975) 21(3.45,-0.325) 22(3.45,0.325) 23(3.45,0.975) 24(3.45,1.625) 25(3.45,2.275) 26(3.45,2.925) 27(3.45,3.575) 28(3.45,4.225)
  silkscreen extent -3.57,-5.25 2,5.25, body extent -2.8,-5.25 2.8,5.25, height 2

## Part data
1: library part PWR2.5, "Power jack"
C1 C2 C3 C4 C5 C6 C7 C8 C9 C10 C11 C12 C13 C14 C15 C16 C17 C18 C19 C20 C21 C22 C23 C24 C25 C26 C27 C28 C29 C30 C31 C32 C33 C34 C35 C36 C37 C38 C39 C40 C41 C42 C43 C44 C45 C46 C47 C48 C49 C50 C53 C54 C55 C56 C57 C58 C59 C60 C61 C62 C63 C64 C65 C66 C67 C68 C69 C70 C71 C72 C73 C74: "Capacitor (Semiconductor SIM Model)"
C51 C52: "Polarized Capacitor (Radial)"
D2: library part Diode, "Default Diode"
DBGEN1 TRST1: "Header, 2-Pin"
FB14 FB15 FB16: library part Inductor, "Inductor"
"ISP PGM2": "Header, 6-Pin"
J2 J3: library part "Micro USB", "Micro USB Jack B"
R1 R2 R3 R4 R5 R6 R7 R8 R9 R12 R13 R14 R15 R16 R17 R18 R19 R20 R21 R22 R23 R24 R25 R26 R27 R28 R29 R30 R31 R32 R33 R34 R35 R36 R37 R38 R39 R40 R41 R42 R43 R44 R45 R46 R47: "Resistor"
SD1: library part "JAE SJ107021 microSD Card Socket"
U5: "32-bit ARM Cortex-M4 MCU, 264 kB SRAM, 2 HS USB with on-chip PHY, Ethernet, CAN, AES, SPIFI, SGPIO, SCT, 144-Pin LQFP"
U10: library part LM3526
X2: "ABS07-32.768KHZ-T RTC Crystal Oscillator"

## Free pads (board coordinates)
  round 125.1 hole 125.1: 0(2400,2000) 0(4400,300)

## Via types
v1: diameter 30, hole 20, Top Layer to Bottom Layer, 83 vias
v2: diameter 25, hole 15, Top Layer to Bottom Layer, 43 vias
v3: diameter 50, hole 28, Top Layer to Bottom Layer, 8 vias
v4: diameter 19.68, hole 7.87, Top Layer to Bottom Layer, 6 vias

## Nets (pads, with @x,y where several pads share a name; then routed paths per layer and width w, separated by ;. In a path a pad name is that pad's centre, name@x,y a point inside that pad or via, vN(x,y) a via of type N, cw(c..) or ccw(c..) an arc to the next point about the centre after c; other vN are vias at no path point)
5VCC: "Power & Reset1.5" C57.2 C58.1 C62.2 L2.2 R20.2 U8.6 U10.7 | length 4611.2
  Top Layer w8: U10.7 U10.7@832.56,1730.81
  Top Layer w10: U8.6 339.84,704.84 v1(370,735)
  Top Layer w15: U10.7@832.56,1730.81 C62.2 840,1653.21 v1(840,1615.65)
  Bottom Layer w10: v1(150,735) 180,765 340,765 v1(370,735)
  Bottom Layer w25: 220,900 80,900 48.5,868.5 48.5,196.5 105,140 657.93,140 687.93,110 856.52,110 916.52,50 3250,50 3300,100
AVDD: C1.2 C2.2 C3.2 C4.2 C5.2 C6.2 C10.2 C11.2 C54.2 C55.1 FB5.1 L1.2 R3.2 R19.2 U1.3 U1.6 U2.3 U2.6 U3.3 U3.6 U4.26 U7.6 | length 1411.9
  Top Layer w10: U7.6 1124.84,704.84 v1(1155,735) ; v2(2250,260) FB5.1 ; v1(3260,470) R3.2 ; U4.26 3570.16,622.22 3582.44,609.93 C10.2 C11.2 3582.44,477.44 v1(3582,477) ; v1(3735,330) 3765,360 3770,360 3779.41,369.41 U1.3 ; U1.6 3889.69,428.86 C1.2 v1(3925,470) ; v1(3935,330) 3960,355 C4.2 3985.31,360.31 3994.41,369.41 U2.3 ; U2.6 4081.42,431.42 4089.69,439.69 C3.2 v1(4120,470) ; v1(4135,330) 4160,355 C6.2 4185.31,360.31 4194.41,369.41 U3.3 ; U3.6 4281.42,441.42 4289.69,449.69 C5.2 v1(4325,470) ; R3.2 3360.02,469.55 R3.2
  Top Layer w25: C55.1 890,825 960,895 v3(990,895)
  Bottom Layer w10: v1(935,735) 965,765 1125,765 v1(1155,735)
DVDD: "ISP PGM2.3" "Power & Reset1.2" "Power & Reset1.4" C8.2 C9.2 C27.2 C28.2 C32.1 C37.2 C38.2 C39.2 C40.2 C41.2 C42.2 C43.2 C44.2 C45.2 C46.2 C47.2 C48.2 C49.2 C50.2 C60.2 C61.1 C71.2 DBGEN1.1 FB1.1 FB2.1 JTAG/DEBUG1.1@2970,1160 L3.2 R1.2 R2.2 R6.1 R7.1 R9.2 R12.2 R17.2 R18.2 R21.2 R22.1 R23.1 R40.1 R41.1 R42.1 R43.1 R44.1 R45.1 SD1.4 TRST1.1 U4.13 U5.5 U5.25 U5.36 U5.41 U5.59 U5.71 U5.77 U5.94 U5.107 U5.111 U5.127 U5.131 U5.141 U9.6 | length 3353
  Top Layer w8: C38.2 C38.2@1480,724.69 ; U5.107@1600.67,725 U5.107 ; U5.71 C41.2
  Top Layer w10: U9.6 734.84,704.84 v1(765,735) ; C38.2 U5.107@1600.67,725 ; v1@1479.69,1275.31 C40.2@1479.69,1315 ; C40.2 U5.77 ; v1(1480,690) C38.2@1480,724.69 ; v1(1480,940) 1480,981.1 U5.94 ; R9.2 v1(1680,115) ; v1(1670,1610) C41.2@1704.88,1610 ; C37.2 v2(1760,525) ; C37.2@1724.88,525.2 U5.111 ; v1(1905,1610) C42.2@1941.1,1610 ; U5.59 C42.2 ; U5.127 2039.84,550.16 2045,545 C48.2 2045.31,520 v2(2075,520) ; C49.2@2118.58,521.1 U5.131 ; v1(2260,1610.32) C43.2 U5.41 ; v2(2280,520) C47.2@2314.68,520 ; C47.2@2315.43,520.12 U5.141 ; R44.1 v1(2385,2835) ; R45.1 2355,2885 v1(2385,2915) ; R43.1 2344.53,2974.53 v1(2345,2975) ; R42.1 2344.53,3170.47 v1(2345,3170) ; R40.1 2370,3260 v1(2395,3285) ; R41.1 2345,3310.47 v1(2345,3350) ; U5.25 2537.95,1177.95 2605,1245 C45.2 2639.69,1245.31 v1(2640,1245) ; U5.36@2459.13,1396.85 C44.2 v1@2605.31,1429.69 ; R12.2 v1(2760,115) ; C8.2 C9.2 3297.44,1087.56 3314.25,1070.75 U4.13
  Top Layer w15: v1(680,2020.65) R22.1 ; R23.1 v1(925,2020.65) ; SD1.4 2183.35,3091.65 2205,3070 C71.2 ; C49.2@2118.58,521.1 C49.2 ; v1(3115,805) R2.2 ; v1(3150,895) 3150,855.47 R1.2 ; R7.1 v1(3795,865) ; R6.1@3760,920.47 v1(3760,960)
  Top Layer w25: C61.1 500,820 575,895 v3(620,895)
  Bottom Layer w10: v1(545,735) 575,765 735,765 v1(765,735)
  other v1: 1480,1275 2605,1430
  other v2: 2150,520
GND: "Digital IO Higher Byte1.4" "ISP PGM1.2" "ISP PGM2.1" "Power & Reset1.6" "Power & Reset1.7" C1.1 C2.1 C3.1 C4.1 C5.1 C6.1 C7.1 C8.1 C9.1 C12.1 C13.1 C16.1 C17.1 C18.1 C19.1 C21.1 C23.1 C24.1 C25.1 C26.1 C27.1 C28.1 C29.1 C30.2 C31.1 C32.2 C35.1 C36.1 C37.1 C38.1 C39.1 C40.1 C41.1 C42.1 C43.1 C44.1 C45.1 C46.1 C47.1 C48.1 C49.1 C50.1 C51.2 C52.2 C53.1 C54.1 C55.2 C56.1 C57.1 C58.2 C59.1 C60.1 C61.2 C62.1 C63.1 C64.1 C65.1 C66.1 C67.1 C68.1 C69.1 C70.1 C71.1 C72.1 C73.1 C74.1 FB3.2 FB4.2 FB6.1 FB11.2 FB12.2 FB13.2 FB14.2 FB15.2 FB16.1 FB17.2 J2.5 J3.5 JTAG/DEBUG1.3 JTAG/DEBUG1.5 JTAG/DEBUG1.9 R8.1 R14.1 R16.1 R25.2 R29.2 R30.2 R31.2 R32.2 R33.2 R46.2 R47.1 RESET1.2 SD1.6 SD1.9 SD1.10 SD1.11 SD1.12 U4.12 U4.21 U5.4 U5.40 U5.76 U5.109 U7.1 U7.4 U7.5 U7.9 U8.1 U8.4 U8.5 U8.9 U9.1 U9.4 U9.5 U9.9 U10.6 X1.2 X1.4 | length 3127.4
  Top Layer w10: v1(693.31,65) FB16.1 ; v1(775,1615.65) v1@777.44,1618.09 ; v1(1350,300) 1350,353.39 ; v1(1380,115) C26.1 ; v1(1400,980) C39.1@1440.32,980 ; v1@1400,1315 C40.1@1440.31,1315 ; v1(1405,725) C38.1 ; v1(1515,1345) 1540,1345 1549.57,1335.43 U5.76 ; v1(1630,2855) SD1.10 ; SD1.9 v1(1630,3255) ; v2(1645,620.87) U5.109 ; v2(1685.32,495.32) C37.1 ; C41.1@1705,1649.88 v1(1705,1690) ; 1707.17,355.55 v1(1774.45,355.55) ; C42.1 v1(1941.42,1690) ; v1(2025,3005) SD1.6 SD1.6 ; v2(2045,450) C48.1 ; v2(2145,305) 2146.38,306.38 FB6.1 ; SD1.12 2166.42,2945 v1(2210,2945) ; SD1.11 2212.95,3197.95 v1(2215,3200) ; C43.1@2295,1650.43 v1(2295,1690) ; C47.1@2315.31,480 v2(2350,480) ; v1(2427.83,300) RESET1.2@2427.83,355.55 ; C71.1 v1(2525,3070) ; v1(2455,115) C29.1 ; C45.1 v1(2605,1325) ; C44.1 v1(2685,1396.85) ; X1.4 v1@2764.49,884.49 ; C31.1 v1(2780,710) ; RESET1.2@2787.72,355 v1(2855,355) ; X1.2 v1(2945,790) ; C30.2 v1(2920,710) ; v1@3225.56,517.44 C18.1 3267.56,520 C13.1 ; U4.12 3339.84,1074.84 3352.56,1087.56 C9.1 C8.1 ; C13.1@3367.44,520 3360,527.44 3360,582.63 3442.2,664.83 U4.21 ; v1(3391.38,375) FB17.2 ; v1(3637.56,365) FB13.2 ; v1(3725,400) 3759.69,400 C2.1 ; v1(3850,505) 3850,470.32 C1.1 ; v1(3925,400) 3959.69,400 C4.1 ; C23.1@3935,1203.31 v1(3935,1245) ; v1(4050,505) 4050,470.32 C3.1 ; v1(4125,400) 4159.69,400 C6.1 ; v1(4250,505) 4250,470.32 C5.1
  Top Layer w15: v1(60,950) C58.2@105,950 ; v1(455,950) C61.2@505,950 ; v1(765,1805.65) 780,1790.65 U10.6 ; v1@777.44,1618.09 C62.1 ; v1(850,950) C55.2@890,950 ; v1(3935,1320) C21.1 ; v1(3940,693.31) FB15.2 ; FB14.2 v1(4241.69,1070)
  Top Layer w25: C74.1 C7.1 C72.1 C73.1
  other v1: 3225,516.6 2765,885 1400,1315.75
  other v2: 2120,450 120,510 150,510 515,510 545,510 905,510 935,510 120,540 150,540 515,540 545,540 905,540 935,540 1180,790 1210,790 385,795 415,795 780,795 810,795 1180,820 1210,820 385,825 415,825 780,825 810,825
  other v3: 840,65
  other v4: 314.25,655 345.75,655 709.25,655 740.75,655 1099.25,655 1130.75,655
Net1_1: 1.1 D2.2 | length 229.4
  Top Layer w30: 1.1 520,340 566.85,386.85 D2.2
Net1_2: 1.2 1.3 FB16.2 | length 503.3
  Top Layer w30: 1.2 283.78,116.22 320.04,79.96 1.3 529.96,79.96 570,120 FB16.2
"NetAnalog Input1_1": "Analog Input1.1" R34.1 | length 165.3
  Top Layer w15: 3800,100 R34.1
"NetAnalog Input1_2": "Analog Input1.2" R35.1 | length 165.3
  Top Layer w15: 3900,100 R35.1
"NetAnalog Input1_3": "Analog Input1.3" R36.1 | length 165.3
  Top Layer w15: 4000,100 R36.1
"NetAnalog Input1_4": "Analog Input1.4" R37.1 | length 165.3
  Top Layer w15: 4100,100 R37.1
"NetAnalog Input1_5": "Analog Input1.5" R38.1 | length 165.3
  Top Layer w15: 4200,100 R38.1
"NetAnalog Input1_6": "Analog Input1.6" R39.1 | length 165
  Top Layer w15: 4300,100 R39.1@4300,265
NetC10_1: C10.1 C11.1 FB13.1 U4.27 | length 287.9
  Top Layer w10: U4.27 3595.75,619.25 3637.56,577.44 C10.1 C11.1 FB13.1
NetC12_2: C12.2 C13.2 R3.1 U4.22 | length 290
  Top Layer w10: R3.1@3424.53,470 3415,479.53 3415,615 3467.8,667.8 U4.22
NetC14_1: C14.1 C15.1 FB17.1 U4.24 | length 374.3
  Top Layer w10: FB17.1@3450,420 C15.1 ; C14.1 C15.1 ; C14.1@3490,470 3490,640 3518.98,668.98 U4.24 ; C15.1@3495,427.56 C15.1
NetC14_2: C14.2 C15.2 U4.25 | length 318.9
  Top Layer w10: C15.2 3549.31,426.75 3549.31,729.43 U4.25
NetC16_2: C16.2 C17.2 U4.23 | length 224.9
  Top Layer w10: C16.2@3467.44,520 3467.44,570 3467.44,642.44 3493.39,668.39 U4.23
NetC18_2: C18.2 C19.2 U4.20 | length 268.3
  Top Layer w10: C18.2 C19.2 3315,590 3330,605 3355,605 3416.61,666.61 U4.20
NetC20_1: C20.1 U4.1 | length 467.7
  Top Layer w15: U4.1 3690.83,1005.83 3730,1045 3730,1275 3773.07,1318.07 C20.1@3825,1318.07
NetC20_2: C20.2 C21.2 R4.1 | length 181.5
  Top Layer w15: C20.2@3825,1451.93 3828.62,1448.31 C21.2 R4.1
NetC22_1: C22.1 U4.28 | length 783.7
  Top Layer w15: U4.28 3650.51,705 3760,705 3825,770 3825,955 3770,1010 3770,1220 3790,1240 C22.1@3830,1240
NetC22_2: C22.2 C23.2 R5.1 | length 186.9
  Top Layer w15: C22.2@3825,1100 3870,1100 3886.69,1116.69 3935,1116.69 R5.1@4005,1116.69
NetC24_2: C24.2 FB2.2 U5.16 | length 201
  Top Layer w10: U5.16 2555.79,1000.79 2570,1015 C24.2 FB2.2@2610.31,971.06
NetC25_2: C25.2 FB1.2 U5.17 | length 207.3
  Top Layer w10: U5.17 2552.84,1020.47 2582.37,1050 C25.2 ; C25.2@2611.38,1051.06 FB1.2
NetC26_2: "ISP PGM1.1" C26.2 R9.1 U5.96
NetC29_2: "Power & Reset1.3" C29.2 JTAG/DEBUG1.10 R12.1 RESET1.1 U5.128 | length 874.6
  Top Layer w8: U5.128 2059.53,580.47 v2(2085,555) ; RESET1.1@2417.83,149.45 2485,216.61 2485,400 2445,440 v2(2445,535)
  Bottom Layer w8: v2(2085,555) 2425,555 v2(2445,535)
NetC30_1: C30.1 U5.13 X1.3 | length 633.7
  Top Layer w10: U5.13 2838.27,941.73 2862.48,917.52 X1.3 2816.05,838.06 C30.1@2816.05,716.39
NetC31_2: C31.2 U5.12 X1.1 | length 389.4
  Top Layer w10: U5.12 2617.95,922.05 2655,885 2655,840 X1.1 ; C31.2 X1.1@2687.44,772.44
NetC33_1: C33.1 C34.1 FB6.2 U5.135 | length 270.3
  Top Layer w10: FB6.2 2197.32,360.94 U5.135
NetC33_2: C33.2 C34.2 FB5.2 U5.137 | length 272.8
  Top Layer w10: U5.137 2236.69,413.31 2250,400 FB5.2
NetC35_2: C35.2 U5.125 X2.1 | length 379.4
  Top Layer w10: C35.2 1990.79,294.21 1973.23,311.77 X2.1 1973.23,403.23 2000.47,430.47 U5.125
NetC36_2: C36.2 U5.126 X2.2 | length 379.2
  Top Layer w10: U5.126 2020.16,429.84 2050,400 X2.2 2050,315 2035.67,300.67 C36.2
NetC63_2: C63.2 C64.2 FB7.1 U10.8 | length 177.7
  Top Layer w8: C63.2@880,1663.09 U10.8 ; C63.2 C64.2 882.44,1556.83 FB7.1
NetC65_2: C65.2 C66.2 FB8.1 U10.5 | length 181.2
  Top Layer w8: FB8.1 730,1559.28 U10.5
NetC67_2: C67.2 FB9.1 R24.1 R25.1 | length 167.4
  Top Layer w15: FB9.1 351.89,1696.25 R25.1 R24.1
NetC68_2: C68.2 FB10.1 R27.1 R29.1
NetDBGEN1_2: DBGEN1.2 R15.2 R16.2
NetFB3_1: FB3.1 U5.23 | length 175.6
  Top Layer w10: U5.23 2521.21,1138.58 2577.63,1195 FB3.1
NetFB4_1: FB4.1 U5.19 | length 187.5
  Top Layer w10: U5.19 2499.84,1059.84 2585,1145 FB4.1
NetFB7_2: FB7.2 R27.2 U5.21
NetFB8_2: FB8.2 R24.2 U5.91
NetFB9_2: FB9.2 J2.1 | length 171.5
  Top Layer w15: J2.1 237.56,1801.96 247.36,1792.15 247.36,1737.15 282.36,1702.15 FB9.2
NetFB10_2: FB10.2 J3.1
NetFB11_1: FB11.1 J2.6 J2.7 J2.8 J2.9
NetFB12_1: FB12.1 J3.6 J3.7 J3.8 J3.9
NetFB14_1: "Stereo Input1.5" FB14.1 | length 136.5
  Top Layer w15: FB14.1 4328.31,1068.31 4356.02,1096.02 4405,1096.02
NetFB15_1: "Stereo Output1.5" FB15.1 | length 415.6
  Top Layer w15: FB15.1 4288.31,606.69 4313.98,581.02 4405,581.02
"NetISP PGM2_4": "ISP PGM2.4" U5.82
"NetISP PGM2_5": "ISP PGM2.5" U5.80
NetJ3_4: J3.4 U5.22
NetJTAG/DEBUG1_2: JTAG/DEBUG1.2 U5.30
NetJTAG/DEBUG1_4: JTAG/DEBUG1.4 R18.1 U5.27
NetJTAG/DEBUG1_6: JTAG/DEBUG1.6 R17.1 U5.31
NetJTAG/DEBUG1_8: JTAG/DEBUG1.8 U5.26
NetL1_1: L1.1 U7.7
NetL2_1: L2.1 U8.7
NetL3_1: L3.1 U9.7
NetR1_1: R1.1 U4.17 U5.88 | length 207.3
  Top Layer w10: R1.1 3265,855 3339.84,780.16 U4.17
NetR2_1: R2.1 U4.16 U5.87 | length 161.3
  Top Layer w10: R2.1 3290,805 3314.25,780.75 U4.16
NetR4_2: "Stereo Input1.4" R4.2 | length 230.1
  Top Layer w15: R4.2 4053.31,1410 4140,1410 4156.73,1426.73 4208.15,1426.73
NetR5_2: "Stereo Input1.1" R5.2 | length 88.8
  Top Layer w15: R5.2@4005,1203.31 4018.31,1203.31 4037.01,1222.01 4086.1,1222.01
NetR6_2: R6.2 U4.2 | length 164.6
  Top Layer w10: U4.2 3595.75,964.25 3606.51,953.49 3634.61,953.49 3668.1,920 R6.2
NetR7_2: R7.2 U4.3 | length 212.7
  Top Layer w10: U4.3 3570.16,964.84 3597.51,937.49 3627.98,937.49 R7.2
NetR8_2: R8.2 U5.24
NetR13_1: R13.1 U5.29
NetR13_2: R13.2 R14.2 TRST1.2
NetR15_1: R15.1 U5.28
NetR19_1: R19.1 U7.8
NetR20_1: R20.1 U8.8
NetR21_1: R21.1 U9.8
NetR22_2: R22.2 U5.72 U10.3 | length 75
  Top Layer w8: R22.2 780,2015.18 U10.3
NetR23_2: R23.2 U5.83 U10.2 | length 72.9
  Top Layer w8: U10.2 830,2020.18 R23.2
NetR34_2: R34.2 U1.1 U1.2 | length 370.5
  Top Layer w8: v2(3755,545) 3775,545 3785,535 3785,444.17 U1.1 U1.2 3821.07,395 3835.31,380.76 3835.31,340 R34.2
  Bottom Layer w8: 3700,565 3710.2,565 3719.2,556 3744,556 v2(3755,545)
NetR35_2: R35.2 U1.4 U1.5 | length 411.7
  Top Layer w8: v2(3780,570) 3800,550 3800,475 3840,435 3840,415 3860,395 U1.5 U1.4 3881.42,343.58 3900,325 R35.2
  Bottom Layer w8: 3700,580 3715,580 3725,570 v2(3780,570)
NetR36_2: R36.2 U2.1 U2.2 | length 591.8
  Top Layer w8: v2(3750,595) 3825,595 3918,502 3948,502 3970,480 3970,440 3989.41,420.59 U2.1 U2.2 4025,395 4045,375 4045,350 4000,305 R36.2
  Bottom Layer w8: 3680,615 3695.2,615 3704.2,606 3739,606 v2(3750,595)
NetR37_2: R37.2 U2.4 U2.5 | length 575.1
  Top Layer w8: v2@3785,620 3796,609 3830.8,609 3923.8,516 3956.8,516 4045,427.8 4045,410 4060,395 U2.5 U2.4 4081.42,343.58 4100,325 R37.2
  Bottom Layer w8: 3705,625 3710,620 v2(3780,620)
NetR38_2: R38.2 U3.1 U3.2 | length 760
  Top Layer w8: v2(3755,645) 3790,645 3812,623 3836.6,623 3929.6,530 4125,530 4208.58,446.42 U3.1 U3.2 4230,395 4235.31,389.68 4235.31,345.32 4200,310 R38.2
  Bottom Layer w8: 3715,635 3725,635 3735,645 v2(3755,645)
NetR39_2: R39.2 U3.4 U3.5 | length 805.9
  Top Layer w8: v2(3780,670) 3790,670 3823,637 3842.4,637 3934.4,545 4130,545 4235.31,439.68 4235.31,428.93 4269.24,395 U3.5 U3.4 4281.42,343.58 4300,325 R39.2
  Bottom Layer w8: 3700,655 3720,655 3735,670 v2(3780,670)
NetR40_2: R40.2 SD1.1 U5.55 | length 216.7
  Top Layer w10: SD1.1 2123.15,3260 R40.2
NetR41_2: R41.2 SD1.2 U5.56 | length 404.6
  Top Layer w10: SD1.2 2056.73,3178.27 2035,3200 2035,3285 2060,3310 R41.2
NetR42_2: R42.2 SD1.3 U5.50 | length 255
  Top Layer w10: SD1.3 2249.96,3134.96 2285.47,3170.47 R42.2
NetR43_2: R43.2 SD1.5 U5.45 | length 282.6
  Top Layer w10: SD1.5 2231.65,3048.35 2285.47,2994.53 R43.2
NetR44_2: R44.2 SD1.7 U5.52 | length 402.5
  Top Layer w10: SD1.7 2056.73,2961.73 2035,2940 2035,2855 2055,2835 R44.2
NetR45_2: R45.2 SD1.8 U5.53 | length 214.6
  Top Layer w10: SD1.8 2118.15,2885 R45.2
NetR46_1: R46.1 U5.79 U10.1
NetR47_2: R47.2 U5.69 U10.4
NetRTCALARM1_1: RTCALARM1.1 U5.129
"NetStereo Output1_1": "Stereo Output1.1" U4.19 | length 844
  Top Layer w15: v1(3390,810) 3391.02,808.98 U4.19
  Bottom Layer w15: v1(3390,810) 3425,845 3585.3,845 3641.3,789 3996,789 4077.99,707.01 4086.1,707.01
"NetStereo Output1_4": "Stereo Output1.4" U4.18 | length 1036.5
  Top Layer w15: v1(3355,835) 3355,795 3365.43,784.57 U4.18
  Bottom Layer w15: v1(3355,835) 3375,855 3405.3,855 3416.3,866 3594,866 3650,810 3994.52,810 4096.25,911.73 4208.15,911.73
NetU4_4: U4.4 U5.14
NetU4_5: U4.5 U5.118
NetU4_6: U4.6 U5.121
NetU4_7: U4.7 U5.32
NetU4_8: U4.8 U5.112
NetU4_9: U4.9 U5.68
NetU4_10: U4.10 U5.116
NetU4_11: U4.11 U5.114
NetU4_14: U4.14 U5.119
NetU4_15: U4.15 U5.122
NetU5_3: U5.3
NetU5_7: U5.7
NetU5_8: U5.8
NetU5_9: U5.9
NetU5_10: U5.10
NetU5_11: U5.11
NetU5_42: U5.42
NetU5_43: U5.43
NetU5_44: U5.44
NetU5_46: U5.46
NetU5_47: U5.47
NetU5_48: U5.48
NetU5_49: U5.49
NetU5_51: U5.51
NetU5_92: U5.92
NetU5_93: U5.93
NetU5_130: U5.130 WAKEUP1.1
NetU5_136: U5.136
NetU5_138: U5.138
NetU5_139: U5.139
NetU5_142: U5.142
NetU5_143: U5.143
NetU5_144: U5.144
USB0_N: J3.2 R33.1 U5.20
USB0_P: J3.3 R32.1 U5.18
USB1_N: J2.2 R26.2 R31.1 | length 191.5
  Top Layer w8: J2.2 286.5,1827.55 R31.1 322.36,1816.68 R26.2
USB1_P: J2.3 R28.2 R30.1 | length 199.2
  Top Layer w8: J2.3 267.87,1853.14 R30.1 322.36,1882.63 R28.2
USB_1_N: C69.2 R26.1 U5.90 | length 1732.2
  Top Layer w8: R26.1 490.39,1816.68 492.36,1814.71 C69.2 540,1814.71 565.94,1840.65 959.35,1840.65 1160,1640 1160,1225 1325.27,1059.73 1570.66,1059.73 1570.77,1059.84 U5.90
USB_1_P: C70.2 R28.1 U5.89 | length 1732.9
  Top Layer w8: R28.1 490.39,1882.63 492.36,1884.59 C70.2 540,1884.59 565.94,1858.65 966.8,1858.65 1178,1647.46 1178,1232.46 1332.73,1077.73 1563.2,1077.73 1565,1079.53 U5.89
VIN: "Power & Reset1.8" C7.2 C51.1 C52.1 C53.2 C56.2 C59.2 C72.2 C73.2 C74.2 D2.1 U7.2 U7.3 U8.2 U8.3 U9.2 U9.3 | length 3803.5
  Top Layer w15: 3600,93.5 3600,100
  Top Layer w25: v3@368.15,470 C56.2 ; D2.1 753.15,243.15 810.79,300.79 C52.1 C51.1 1175,275.79 C73.2 ; v3(750,175) C73.2@1168.15,175 ; v3(763.15,450) C59.2@763.15,545 ; v3(1085,400) 1153.15,468.15 C53.2 ; 3556.5,50 3600,93.5
  Top Layer w26: v3(1265,100) 1315,50 3556.5,50
  other v3: 368.15,470
pads on no net: "Digital IO Higher Byte1.1" "Digital IO Higher Byte1.2" "Digital IO Higher Byte1.3" "Digital IO Higher Byte1.5" "Digital IO Higher Byte1.6" "Digital IO Higher Byte1.7" "Digital IO Higher Byte1.8" "Digital IO Higher Byte1.9" "Digital IO Higher Byte1.10" "Digital IO Lower Byte1.1" "Digital IO Lower Byte1.2" "Digital IO Lower Byte1.3" "Digital IO Lower Byte1.4" "Digital IO Lower Byte1.5" "Digital IO Lower Byte1.6" "Digital IO Lower Byte1.7" "Digital IO Lower Byte1.8" "ISP PGM2.2" "ISP PGM2.6" "Power & Reset1.1" "Stereo Input1.3" "Stereo Input1.6" "Stereo Input1." "Stereo Output1.3" "Stereo Output1.6" "Stereo Output1." J2.4 J2.GND J3.GND JTAG/DEBUG1.1@3001.5,1084.41 JTAG/DEBUG1.7 U5.1 U5.2 U5.6 U5.15 U5.33 U5.34 U5.35 U5.37 U5.38 U5.39 U5.54 U5.57 U5.58 U5.60 U5.61 U5.62 U5.63 U5.64 U5.65 U5.66 U5.67 U5.70 U5.73 U5.74 U5.75 U5.78 U5.81 U5.84 U5.85 U5.86 U5.95 U5.97 U5.98 U5.99 U5.100 U5.101 U5.102 U5.103 U5.104 U5.105 U5.106 U5.108 U5.110 U5.113 U5.115 U5.117 U5.120 U5.123 U5.124 U5.132 U5.133 U5.134 U5.140

## Polygon pours and split planes (outlines as drawn)
NetC26_2 on Top Layer "Power Plane-No Net" (solid, remove dead copper, pour order 43): 1304.31,206.28 1304.31,141.28 1459.31,141.28 1459.31,91.28 1599.31,91.28 1599.31,141.28 1754.31,141.28 1754.31,211.28 1304.31,211.28 1304.31,201.28
NetC29_2 on Top Layer "Power Plane-No Net" (solid, remove dead copper, pour order 43): 2375.61,206.28 2375.61,141.28 2530.61,141.28 2530.61,91.28 2670.61,91.28 2670.61,141.28 2825.61,141.28 2825.61,211.28 2375.61,211.28 2375.61,201.28
NetFB11_1 on Top Layer "Power Plane-No Net" (solid, remove dead copper, pour order 22): 37.36,1607.15 37.36,2067.15 267.36,2067.15 267.36,1607.15
NetFB12_1 on Top Layer "Power Plane-No Net" (solid, remove dead copper, pour order 21): 35.57,1124.02 35.57,1584.02 250.57,1584.02 250.57,1124.02
VIN on Top Layer "Power Plane-No Net" (solid, remove dead copper, pour order 25): 310,495 405,495 405,600 345,600 345,635 310,635
VIN on Top Layer "Power Plane-No Net" (solid, remove dead copper, pour order 24): 705,495 800,495 800,600 740,600 740,635 705,635
VIN on Top Layer "Power Plane-No Net" (solid, remove dead copper, pour order 23): 1095,495 1190,495 1190,600 1130,600 1130,635 1095,635
5VCC on Top Layer "Power Plane-No Net" (solid, remove dead copper, pour order 31): 70,650 185,650 185,665 250,665 250,735 265,735 265,845 70,845
NetR20_1 on Top Layer "Power Plane-No Net" (solid, remove dead copper, pour order 37): 185,665 185,600 280,600 280,635 310,635 310,710 250,710 250,665 185,665
NetL2_1 on Top Layer "Power Plane-No Net" (solid, remove dead copper, pour order 40): 265,845 355,845 355,715 335,715 335,675 305,675 305,710 265,710
DVDD on Top Layer "Power Plane-No Net" (solid, remove dead copper, pour order 30): 465,650 580,650 580,665 645,665 645,735 660,735 660,845 465,845
AVDD on Top Layer "Power Plane-No Net" (solid, remove dead copper, pour order 29): 855,650 970,650 970,665 1035,665 1035,735 1050,735 1050,845 855,845
NetR21_1 on Top Layer "Power Plane-No Net" (solid, remove dead copper, pour order 36): 580,665 580,600 675,600 675,635 705,635 705,710 645,710 645,665 580,665
NetR19_1 on Top Layer "Power Plane-No Net" (solid, remove dead copper, pour order 35): 970,665 970,600 1065,600 1065,635 1095,635 1095,710 1035,710 1035,665 970,665
GND on Top Layer "Power Plane-No Net" (solid, remove dead copper, pour order 28): 310,495 70,495 70,650 185,650 185,600 280,600 280,635 310,635
NetL3_1 on Top Layer "Power Plane-No Net" (solid, remove dead copper, pour order 39): 660,845 750,845 750,715 730,715 730,675 700,675 700,710 660,710
GND on Top Layer "Power Plane-No Net" (solid, remove dead copper, pour order 27): 705,495 465,495 465,650 580,650 580,600 675,600 675,635 705,635
GND on Top Layer "Power Plane-No Net" (solid, remove dead copper, pour order 26): 1095,495 855,495 855,650 970,650 970,600 1065,600 1065,635 1095,635
NetL1_1 on Top Layer "Power Plane-No Net" (solid, remove dead copper, pour order 38): 1050,845 1140,845 1140,715 1120,715 1120,675 1090,675 1090,710 1050,710
GND on Top Layer "Power Plane-No Net" (solid, remove dead copper, pour order 34): 290,630 370,630 370,600 405,600 405,495 455,495 455,845 365,845 365,680 290,680
GND on Top Layer "Power Plane-No Net" (solid, remove dead copper, pour order 33): 685,630 765,630 765,600 800,600 800,495 850,495 850,845 760,845 760,680 685,680
GND on Top Layer "Power Plane-No Net" (solid, remove dead copper, pour order 32): 1075,630 1155,630 1155,600 1190,600 1190,495 1240,495 1240,845 1150,845 1150,680 1075,680
GND on GND (split plane): 4379.9,2031.68 4379.9,1600 4380.29,1596.08 4381.43,1592.31 4383.29,1588.83 4385.79,1585.79 4479.9,1491.68 4479.9,208.32 4385.79,114.21 4383.29,111.17 4381.43,107.69 4380.29,103.92 4379.9,100 4379.9,20.1 20.1,20.1 20.1,2079.9 4331.68,2079.9
DVDD on Power (split plane): 1184.9,265.1 1115.1,265.1 1115.1,334.9 1184.9,334.9
DVDD on Power (split plane): 919.9,265.1 850.1,265.1 850.1,334.9 919.9,334.9
DVDD on Power (split plane): 3249.9,132.89 3249.9,20.1 1345.1,20.1 1345.1,194.9 3187.89,194.9
AVDD on Power (split plane): 1369.9,872.89 1369.9,450 1370.29,448.05 1371.4,446.4 1506.4,311.4 1508.05,310.29 1510,309.9 2865,309.9 2866.95,310.29 2868.6,311.4 2923.6,366.4 2924.71,368.05 2925.1,370 2925.1,547.89 3247.11,869.9 3652.89,869.9 3756.4,766.4 3758.05,765.29 3760,764.9 4479.9,764.9 4479.9,208.32 4385.79,114.21 4383.29,111.17 4381.43,107.69 4380.29,103.92 4379.9,100 4379.9,20.1 3260.1,20.1 3260.1,135 3259.71,136.95 3258.6,138.6 3193.6,203.6 3191.95,204.71 3190,205.1 1342.11,205.1 1255.1,292.11 1255.1,750 1254.71,751.95 1253.6,753.6 1178.6,828.6 1176.95,829.71 1175,830.1 805.1,830.1 805.1,919.9 1322.89,919.9
DVDD on Power (split plane): 4379.9,2031.68 4379.9,1600 4380.29,1596.08 4381.43,1592.31 4383.29,1588.83 4385.79,1585.79 4479.9,1491.68 4479.9,775.1 3762.11,775.1 3658.6,878.6 3656.95,879.71 3655,880.1 3245,880.1 3243.05,879.71 3241.4,878.6 2916.4,553.6 2915.29,551.95 2914.9,550 2914.9,372.11 2862.89,320.1 1512.11,320.1 1380.1,452.11 1380.1,875 1379.71,876.95 1378.6,878.6 1328.6,928.6 1326.95,929.71 1325,930.1 800,930.1 798.05,929.71 796.4,928.6 795.29,926.95 794.9,925 794.9,825 795.29,823.05 796.4,821.4 798.05,820.29 800,819.9 1172.89,819.9 1244.9,747.89 1244.9,600.1 20.1,600.1 20.1,2079.9 4331.68,2079.9
VIN on Power (split plane): 1244.9,290 1245.29,288.05 1246.4,286.4 1334.9,197.89 1334.9,20.1 20.1,20.1 20.1,589.9 1244.9,589.9

## Keep-outs
Keep-Out Layer:
  lines w10: 25,25 25,2075 4330,2075 4375,2030 4375,1590 4475,1490 4475,215 4375,115 4375,25 25,25

## Other copper
Power (plane layer: these items are gaps in the copper):
  lines w10: 0,595 1250,595 ; 1340,10 1340,200 ; 3255,0 3255,135 3190,200 1340,200 ; 4500,770 3760,770 3655,875 3245,875 2920,550 2920,370 2865,315 1510,315 1375,450 1375,875 1325,925 800,925 800,825 1175,825 1250,750 1250,290 1340,200 ; 845,260 925,260 925,340 845,340 845,260 ; 1110,260 1110,340 1190,340 1190,260 1110,260

## Silkscreen, mask and mechanical layers (free items; w line width, h text height)
Top Overlay:
  text "Designed By" at 3699,1752 h70
  text "Adam J. Vadala-Roth" at 3697,1698 h70
  text "d" at 3694,1616 h150
Mechanical 15:
  circle w5: c2400,2000 r62.5
  circle w5: c4400,300 r62.5
  lines w5: 0,0 4400,0 4400,100 4500,200 4500,1500 4400,1600 4400,2040 4340,2100 0,2100 0,0

## Text inside footprints (layer, text, board x,y; h text height)
"Analog Input1": Top Overlay "A0" at 3820,160 h78.74 r90; Top Overlay "A1" at 3920,160 h78.74 r90; Top Overlay "A2" at 4020,160 h78.74 r90; Top Overlay "A3" at 4125,160 h78.74 r90; Top Overlay "A4" at 4225,160 h78.74 r90; Top Overlay "A5" at 4325,160 h78.74 r90
C51: Top Overlay "+" at 1240,280 h59.06 r90
C52: Top Overlay "+" at 975,280 h59.06 r90
"Digital IO Higher Byte1": Top Overlay "SCL" at 2565,1815 h78.74 r90; Top Overlay "SDA" at 2655,1810 h78.74 r90; Top Overlay "AREF" at 2760,1770 h78.74 r90; Top Overlay "GND" at 2865,1805 h78.74 r90; Top Overlay "~ 13" at 2965,1800 h78.74 r90; Top Overlay "12" at 3065,1855 h78.74 r90; Top Overlay "~ 11" at 3160,1795 h78.74 r90; Top Overlay "~ 10" at 3265,1795 h78.74 r90; Top Overlay "~ 9" at 3365,1835 h78.74 r90; Top Overlay "8" at 3465,1890 h78.74 r90
"Digital IO Lower Byte1": Top Overlay "7" at 3625,1895 h78.74 r90; Top Overlay "~ 6" at 3725,1835 h78.74 r90; Top Overlay "~ 5" at 3825,1835 h78.74 r90; Top Overlay "4" at 3925,1890 h78.74 r90; Top Overlay "~ 3" at 4025,1835 h78.74 r90; Top Overlay "2" at 4125,1890 h78.74 r90; Top Overlay "TX 1" at 4220,1790 h78.74 r90; Top Overlay "RX 0" at 4325,1785 h78.74 r90
"Power & Reset1": Top Overlay "IOREF" at 3025,170 h78.74 r90; Top Overlay "RESET" at 3120,170 h78.74 r90; Top Overlay "3.3V" at 3225,170 h78.74 r90; Top Overlay "5V" at 3320,170 h78.74 r90; Top Overlay "GND" at 3420,170 h78.74 r90; Top Overlay "GND" at 3525,170 h78.74 r90; Top Overlay "VIN" at 3625,170 h78.74 r90